# Altium PCB 8x8v2.PcbDoc (part 1 of 3)
Units mil, origin at the board's own origin, x right, y up, seen from the top; angles counter-clockwise.
Board outline 3661.42 x 3661.42 mil, 4 copper layers (Top Layer, VCC Plane, GND Plane, Bottom Layer), stack 30.635 mil thick; 389 components, 265 nets, 1171 pads, 321 vias.
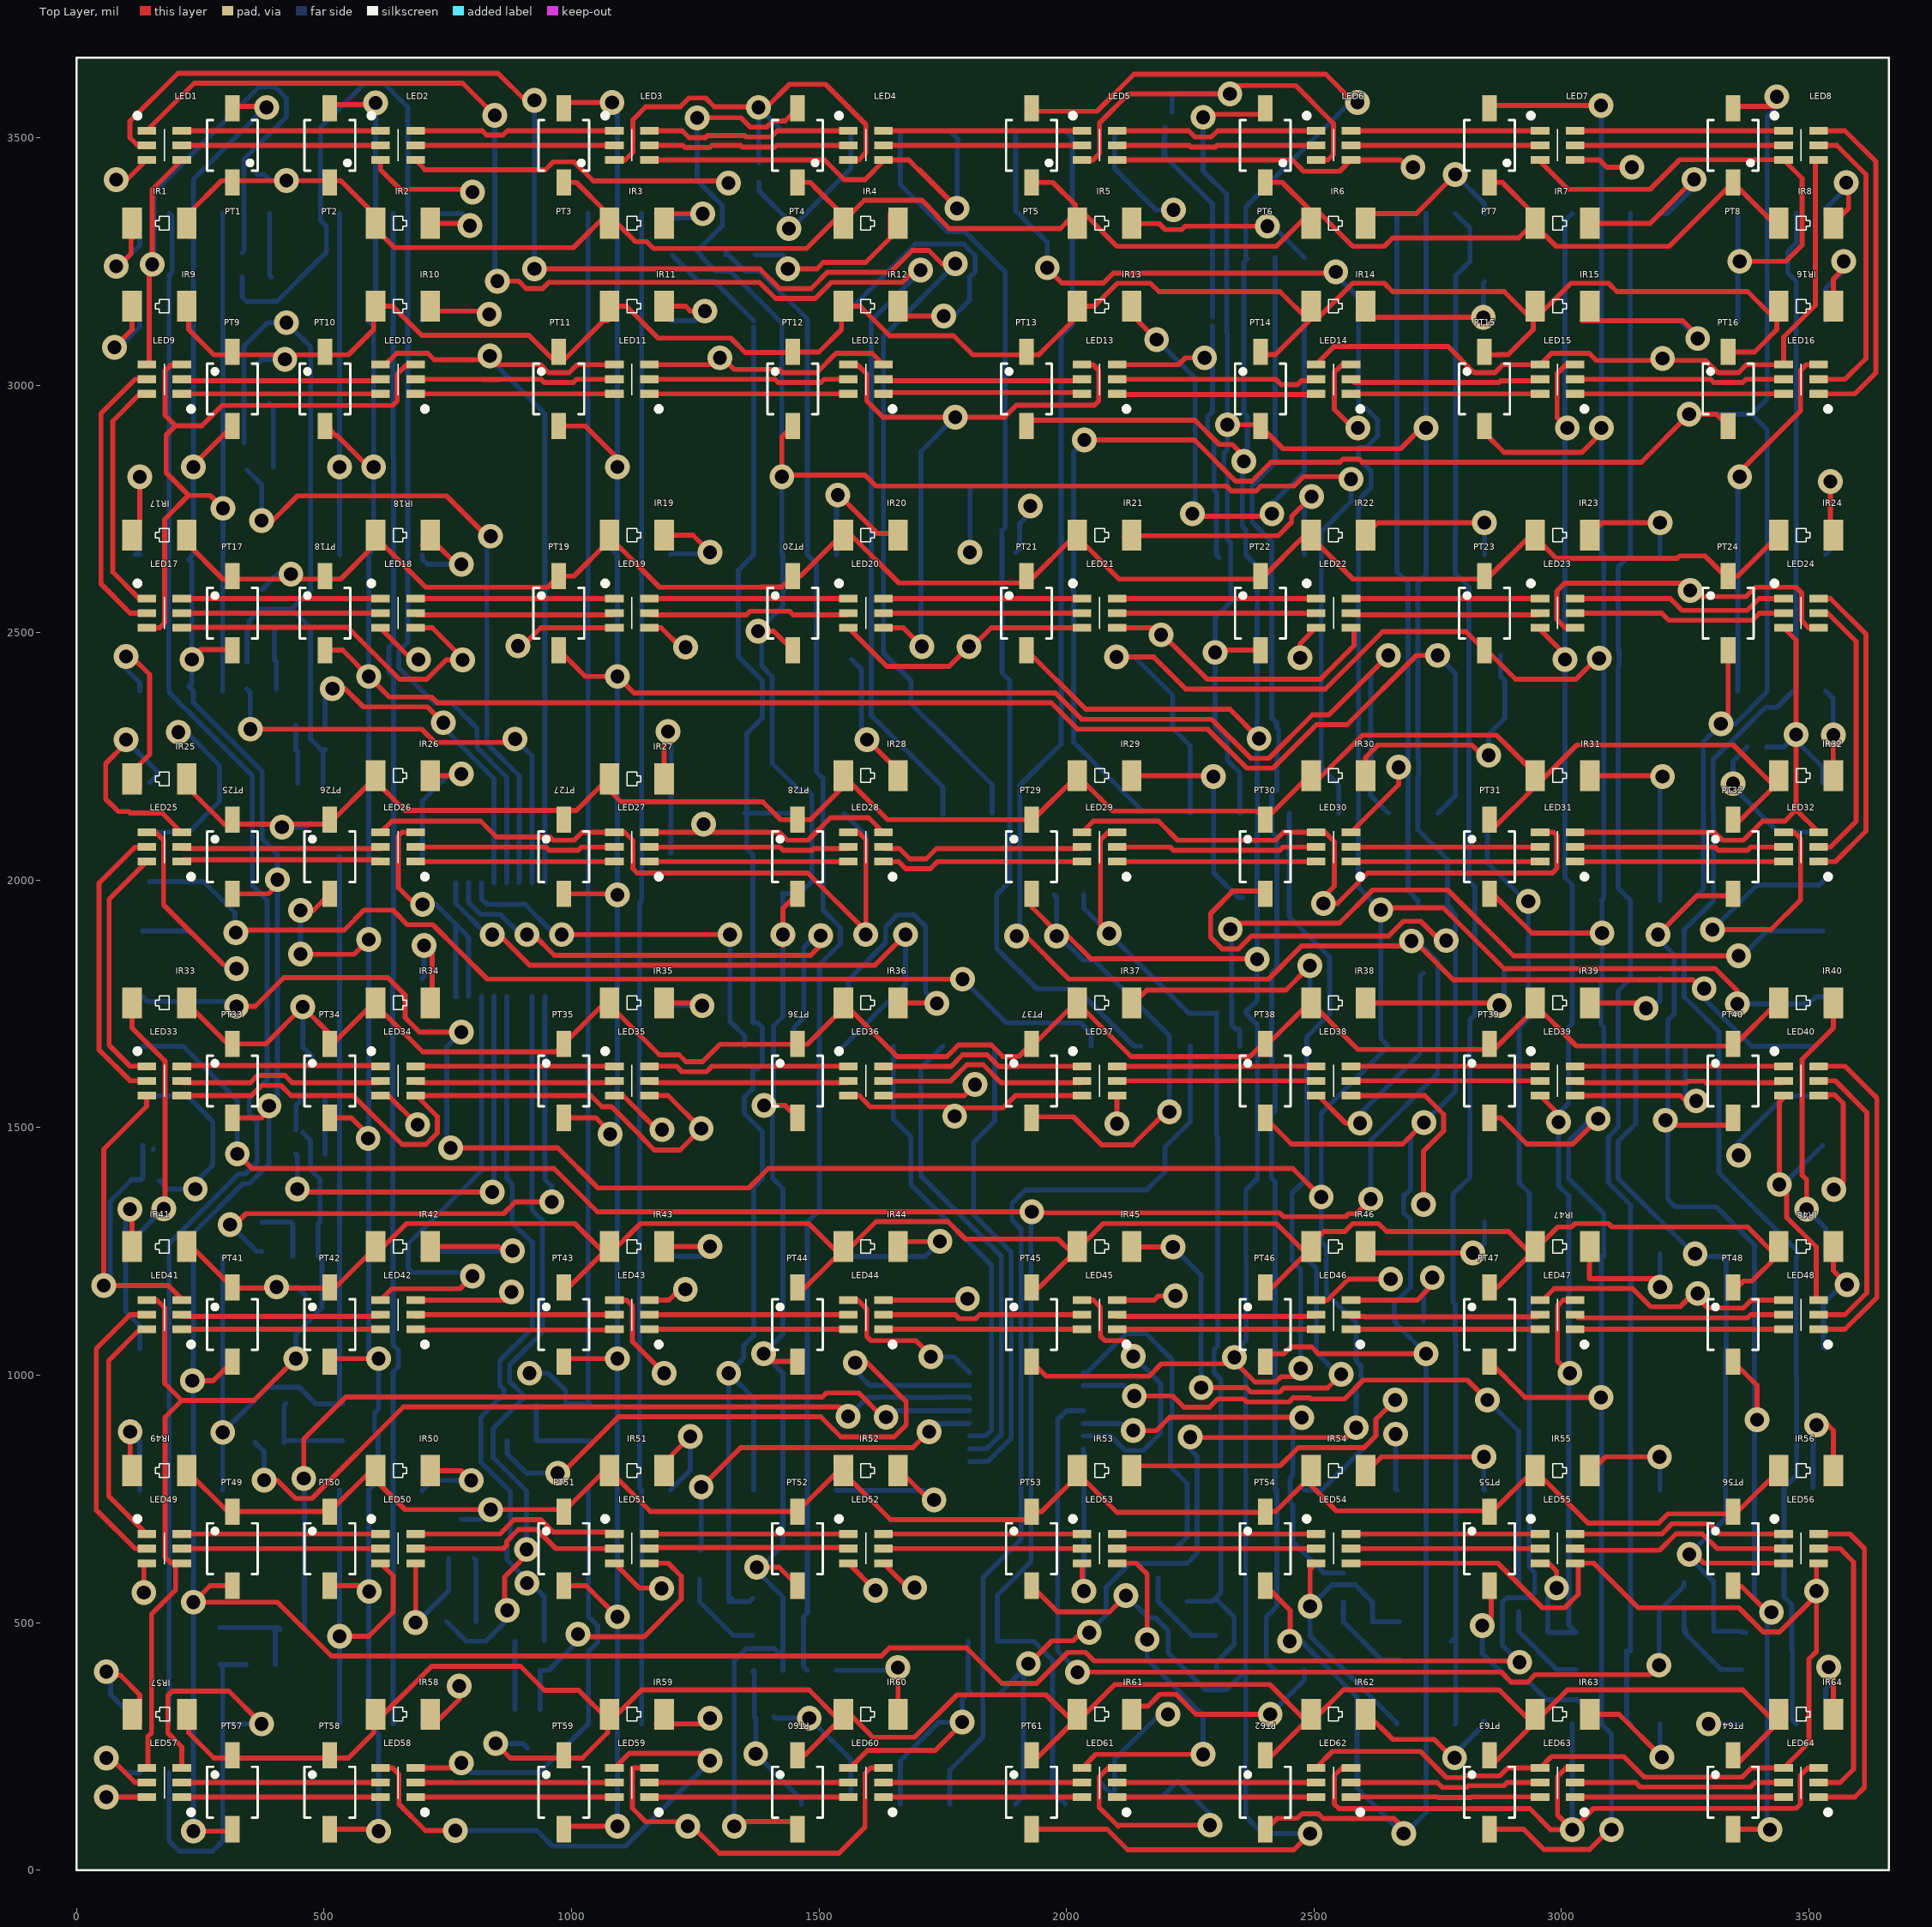
[diagram p0: Top Layer view]
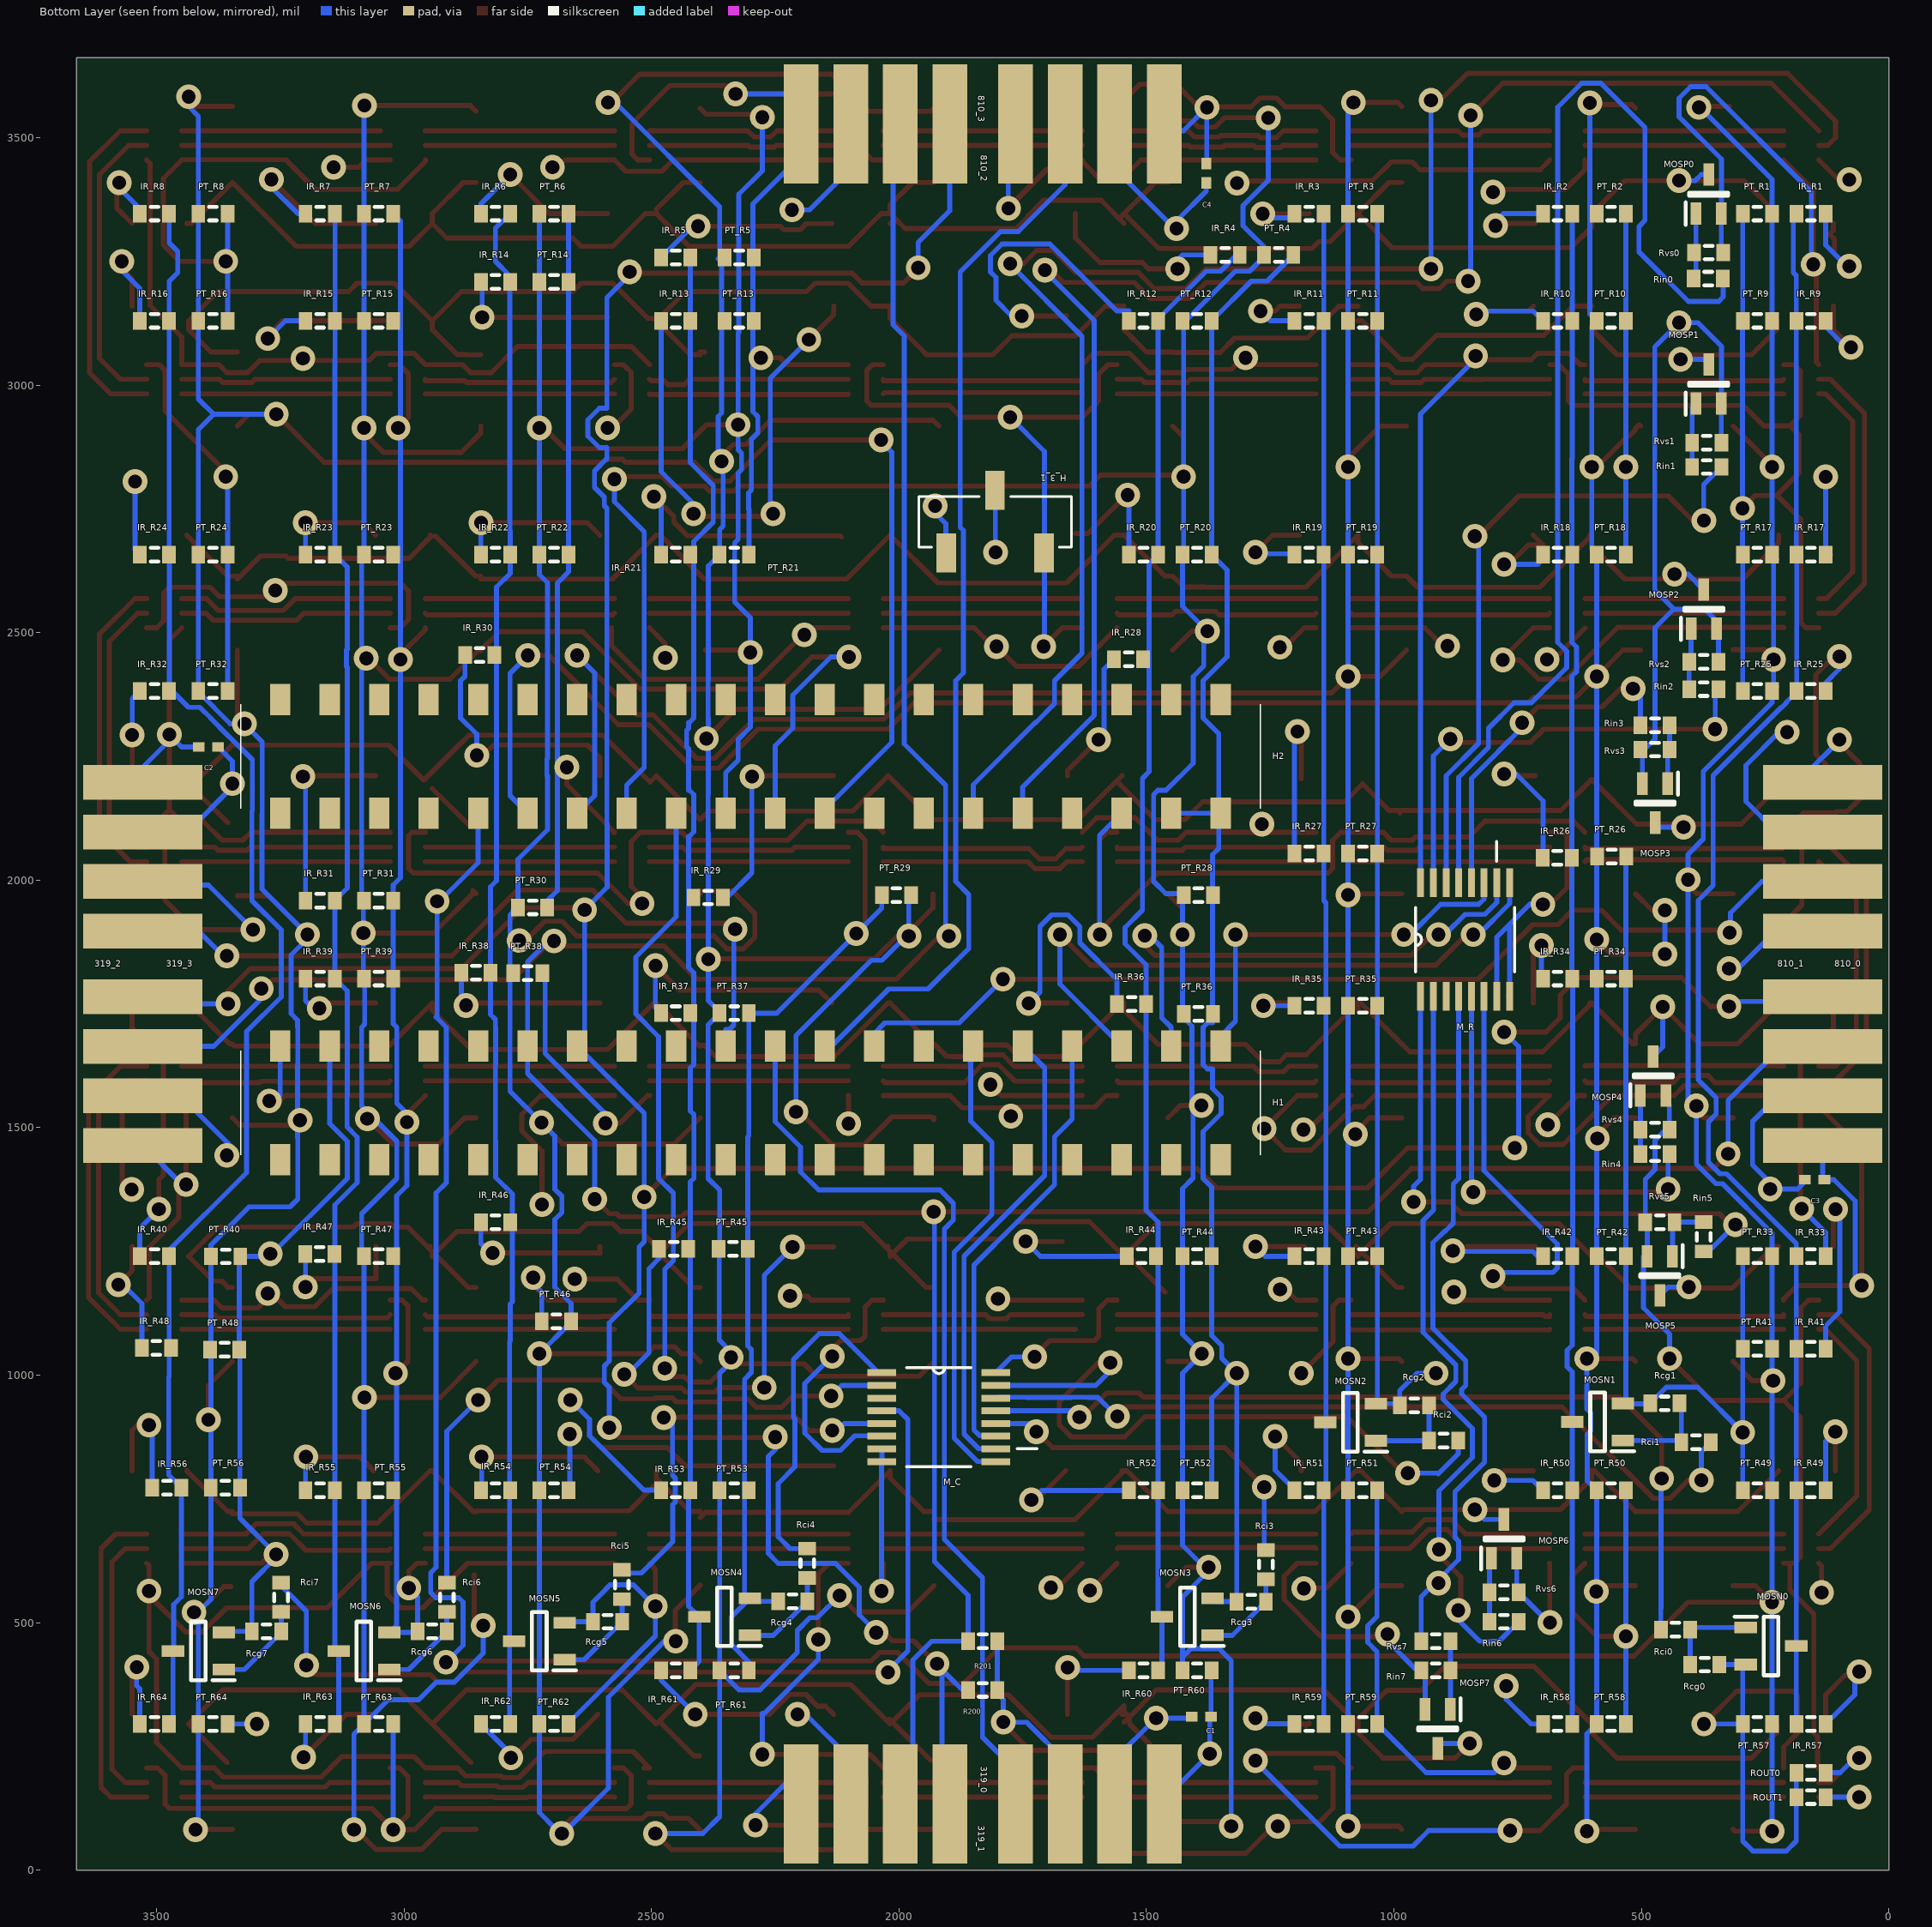
[diagram p1: Bottom Layer view, seen from below]
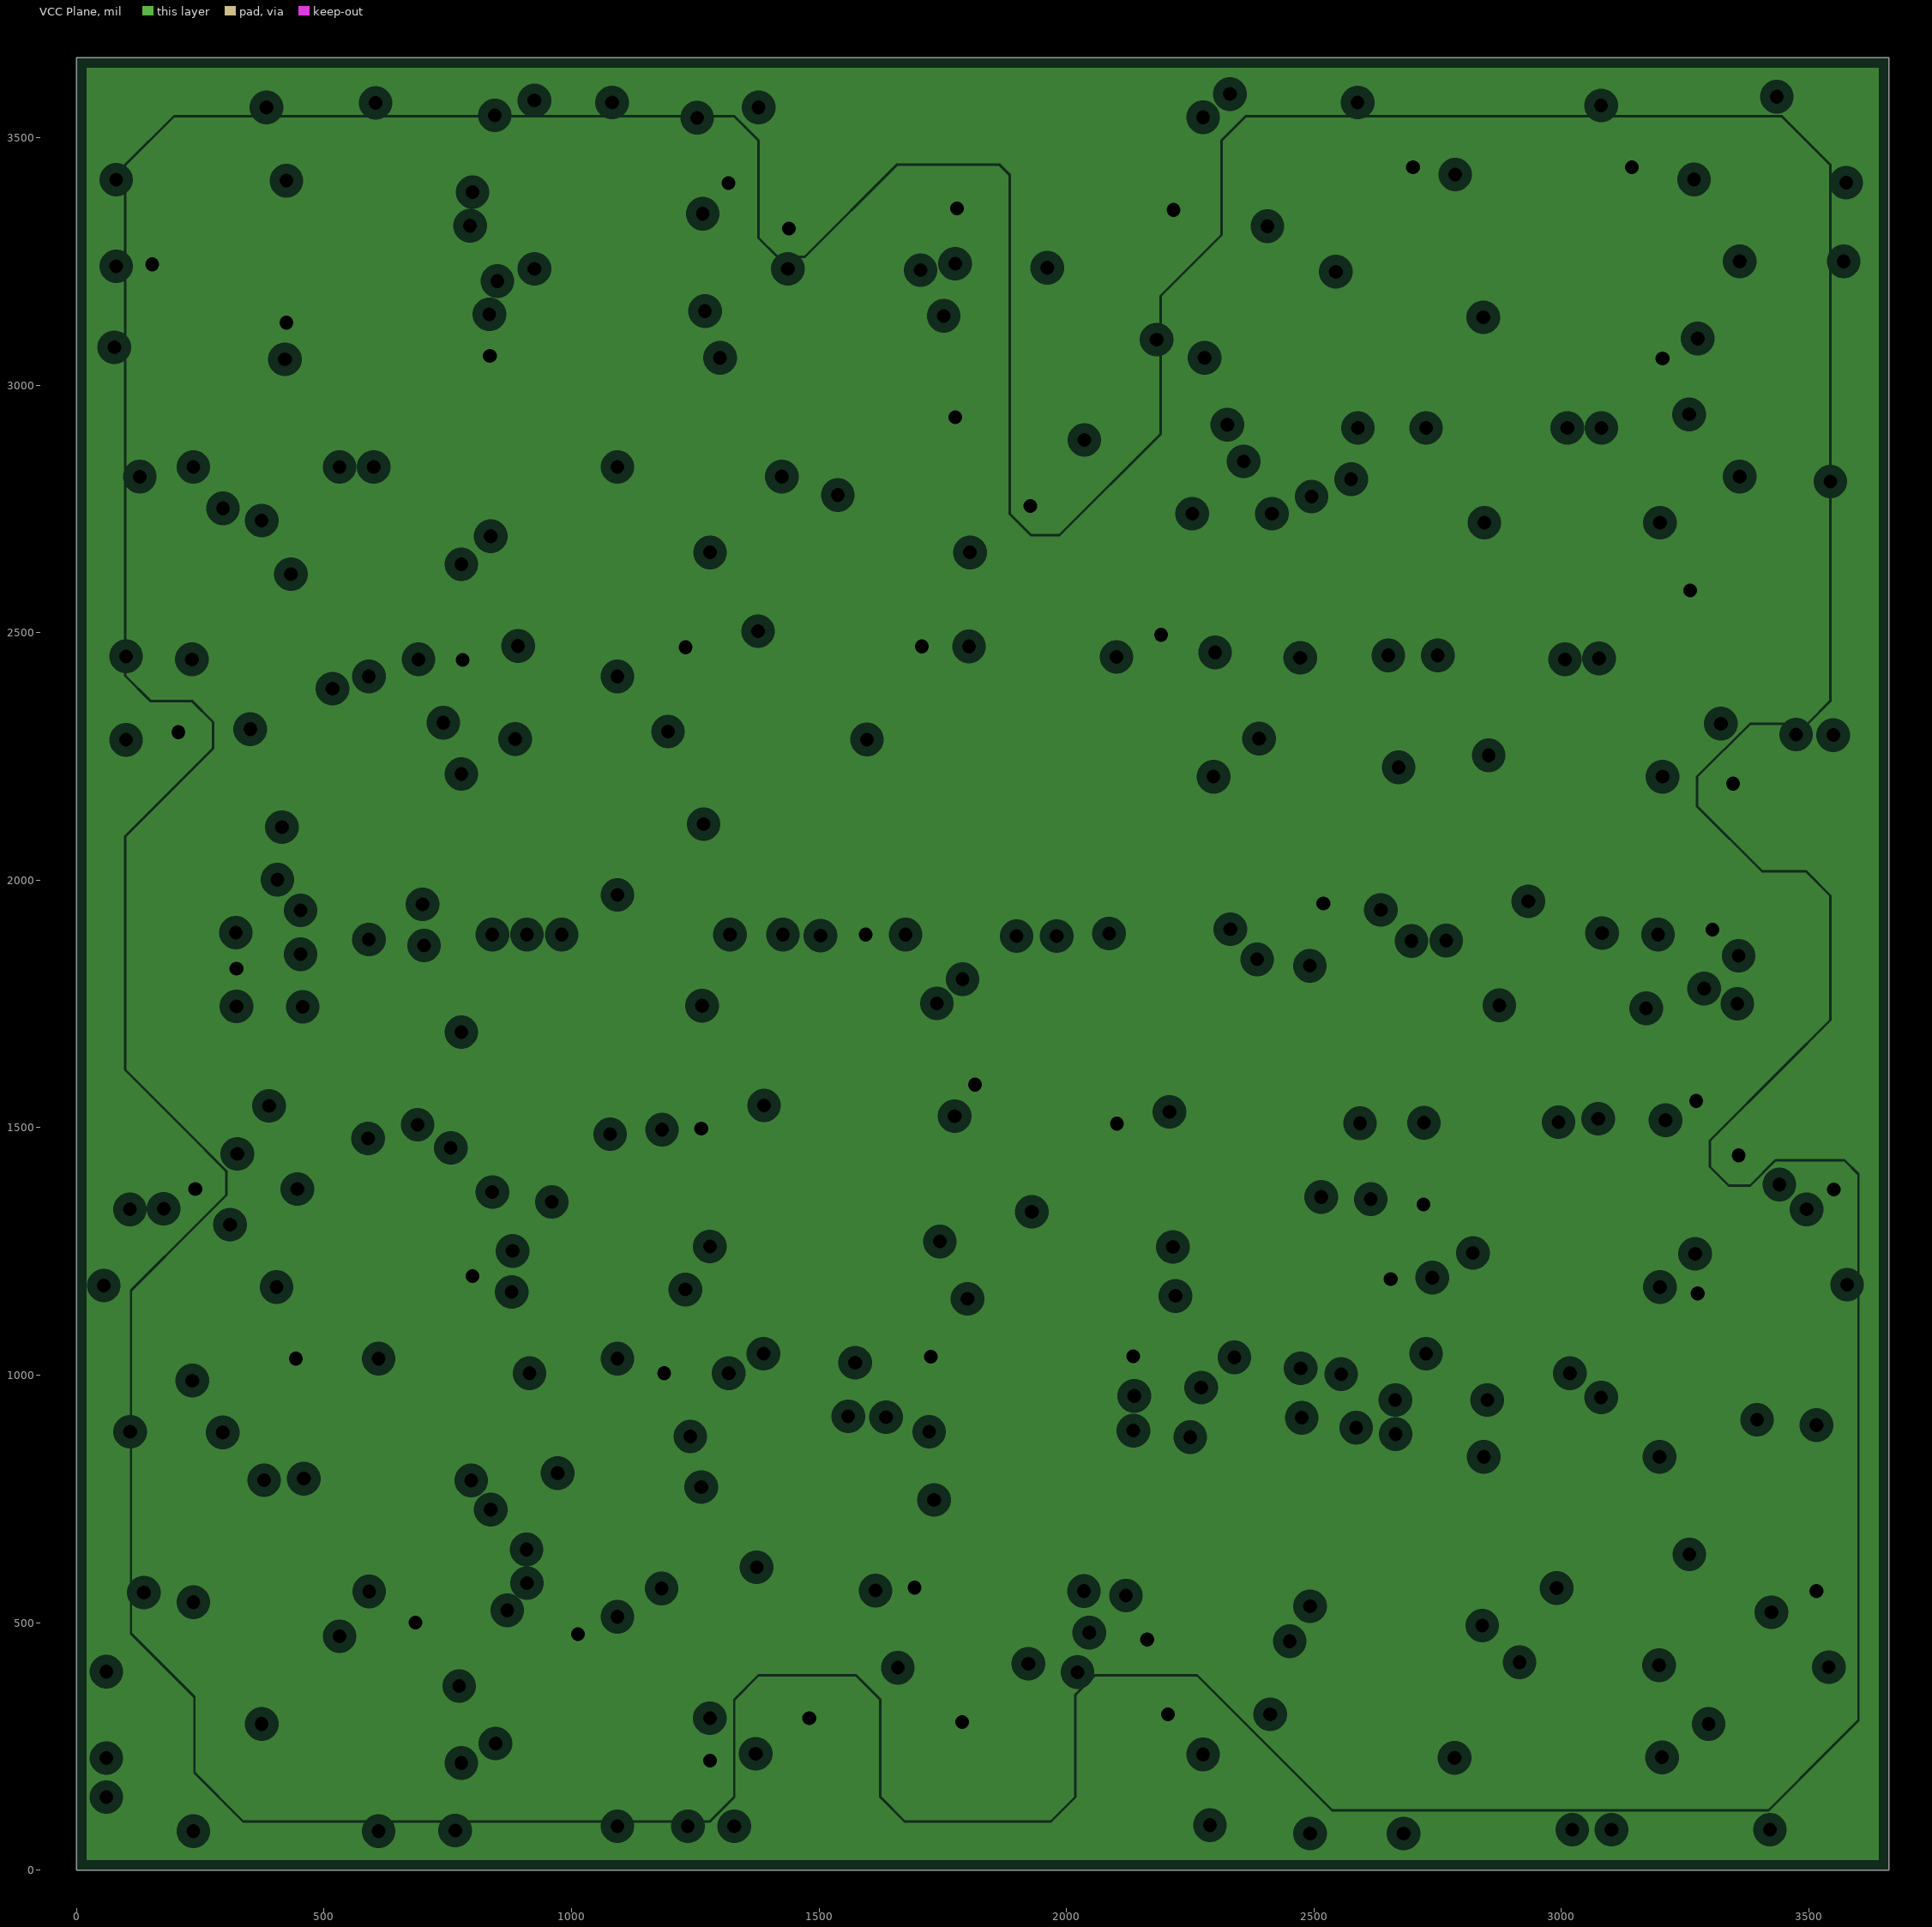
[diagram p2: VCC Plane, clearances drawn from the general rule]
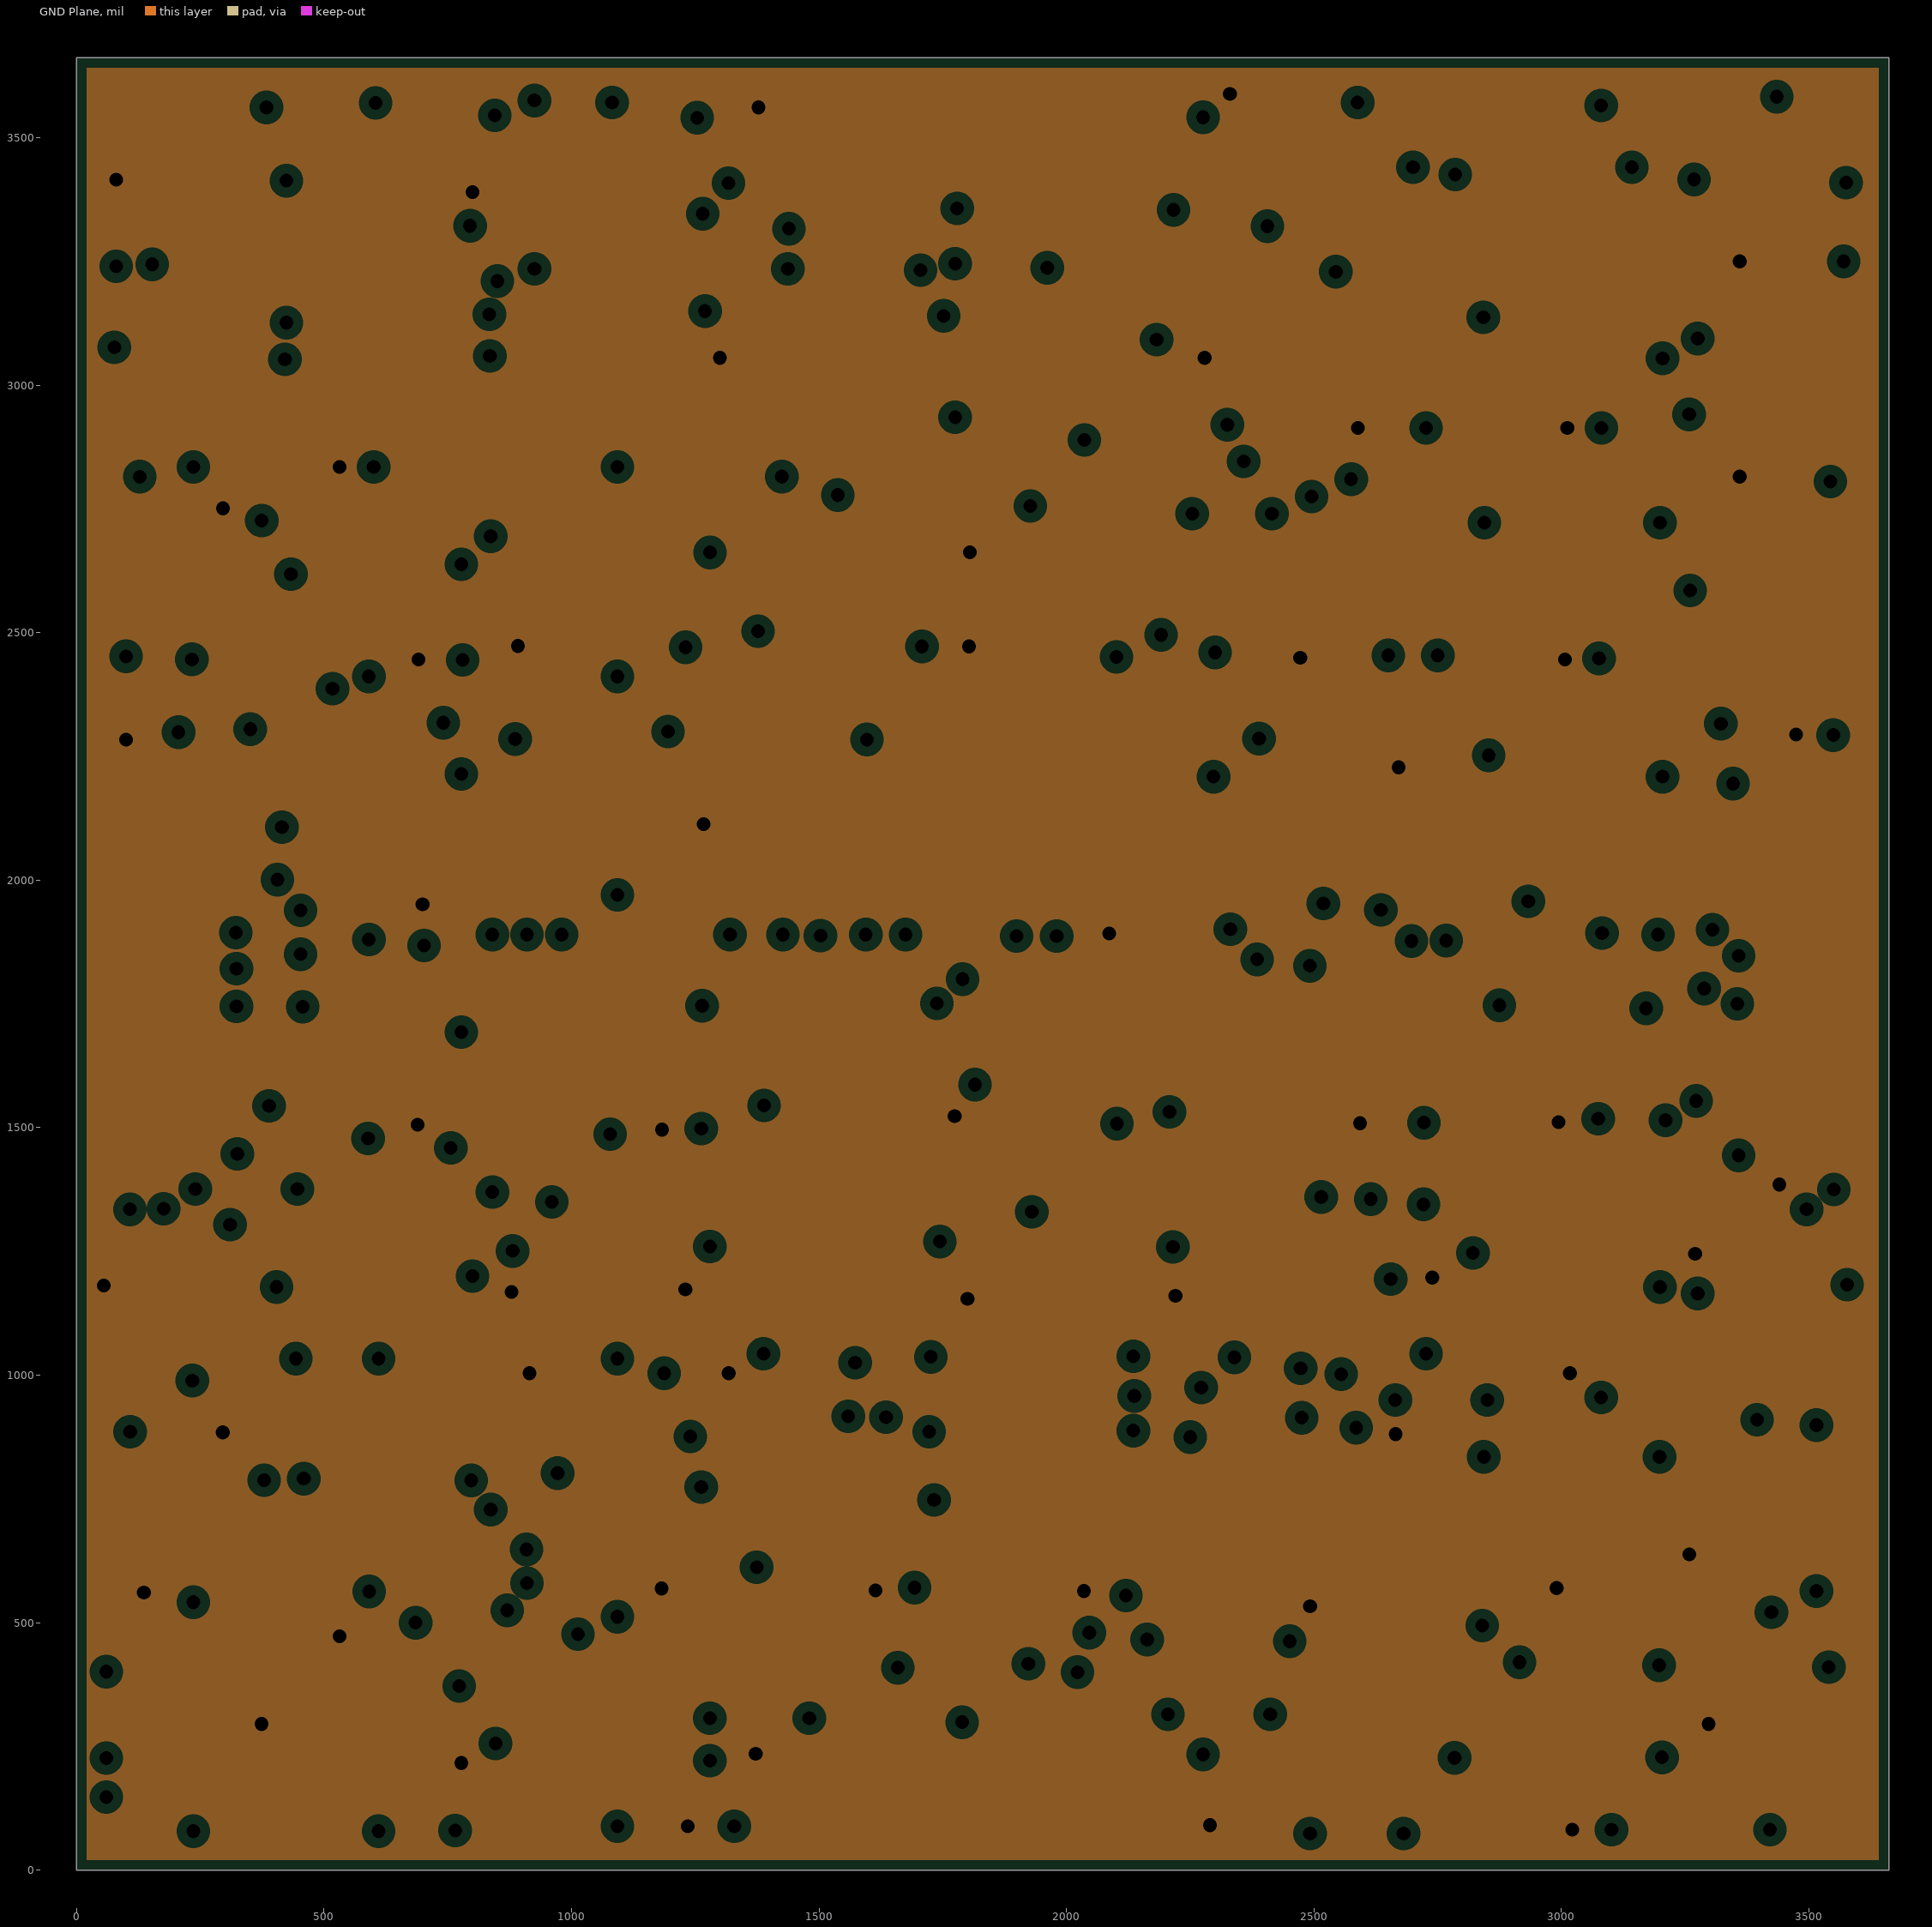
[diagram p3: GND Plane, clearances drawn from the general rule]

## Layer stack, top to bottom
Top Solder: solder mask 0.4, Solder Resist, Dk 3.5
Top Layer: signal copper 1.4
Dielectric 1: core 10, FR-4, Dk 4.2
VCC Plane: plane copper 1.4173, net (Multiple Nets)
Dielectric 4: prepreg 5, Dk 4.2
GND Plane: plane copper 1.4173, net GND
Dielectric 3: core 10, Dk 4.2
Bottom Layer: signal copper 1.4
Bottom Solder: solder mask 0.4, Solder Resist, Dk 3.5

## Board outline
0,0 3661.42,0 3661.42,3661.42 0,3661.42

## Design rules (kind name [scope] priority, off if disabled: settings)
Clearance [All] p1: gap=10
PlaneClearance [All] p1: clearance=20
PlaneConnect [All] p1: planeconnectstyle=Relief reliefexpansion=20 reliefentries=4 reliefconductorwidth=10 reliefairgap=10
PolygonConnect [All] p1: connectstyle=Relief reliefconductorwidth=10 reliefentries=4 polygonreliefangle="90 Angle" airgapwidth=10
RoutingVias [All] p1: holewidth=28 width=50 viastyle="Through Hole" minholewidth=28 minwidth=50 maxholewidth=28 maxwidth=50
SolderMaskExpansion [All] p1: expansion=4
Width [All] p1: maxlimit=10 minlimit=10 preferedwidth=10
28 further rules are at their usual default settings.

## Components (designator, comment, footprint, x,y, rotation, side; value= is the part's Value field where it differs from the comment)
319_0 "319_4" 319_4 1614.17,133.86 r180 bottom
319_1 "319_4" 319_4 2047.24,133.86 r180 bottom
319_2 "319_4" 319_4 3527.56,2047.24 r90 bottom
319_3 "319_4" 319_4 3527.56,1614.17 r90 bottom
810_0 "810_4" 810_4 133.86,2047.24 r90 bottom
810_1 "810_4" 810_4 133.86,1614.17 r90 bottom
810_2 "810_4" 810_4 1614.17,3527.56 r180 bottom
810_3 "810_4" 810_4 2047.24,3527.56 r180 bottom
C1 "Cap Semi" 0402 1389,310 r0 bottom
C2 "Cap Semi" 0402 3395,2269 r180 bottom
C3 "Cap Semi" 0402 150,1395 r0 bottom
C4 "Cap Semi" 0402 1379,3428 r270 bottom
H1 "NPTC202KFMS-RC" NPTC202KFMS-RC 2300,1550 r180 bottom
H2 "NPTC202KFMS-RC" NPTC202KFMS-RC 2300,2250 r180 bottom
H_3_1 "3POSHEADER" 3POSHEADER 1806,2724 r0 bottom
IR1 "IR26-51C" "SFH 4056" 167.32,3326.77 r0 top
IR2 "IR26-51C" "SFH 4056" 659.45,3326.77 r180 top
IR3 "IR26-51C" "SFH 4056" 1131.89,3326.77 r180 top
IR4 "IR26-51C" "SFH 4056" 1604.33,3326.77 r180 top
IR5 "IR26-51C" "SFH 4056" 2076.77,3326.77 r180 top
IR6 "IR26-51C" "SFH 4056" 2549.21,3326.77 r180 top
IR7 "IR26-51C" "SFH 4056" 3001.97,3326.77 r180 top
IR8 "IR26-51C" "SFH 4056" 3494.09,3326.77 r180 top
IR9 "IR26-51C" "SFH 4056" 167.32,3159.45 r0 top
IR10 "IR26-51C" "SFH 4056" 659.45,3159.45 r180 top
IR11 "IR26-51C" "SFH 4056" 1131.89,3159.45 r180 top
IR12 "IR26-51C" "SFH 4056" 1604.33,3159.45 r180 top
IR13 "IR26-51C" "SFH 4056" 2076.77,3159.45 r180 top
IR14 "IR26-51C" "SFH 4056" 2549.21,3159.45 r180 top
IR15 "IR26-51C" "SFH 4056" 3001.97,3159.45 r180 top
IR16 "IR26-51C" "SFH 4056" 3494.09,3159.45 r180 top
IR17 "IR26-51C" "SFH 4056" 167.32,2696.85 r0 top
IR18 "IR26-51C" "SFH 4056" 659.45,2696.85 r180 top
IR19 "IR26-51C" "SFH 4056" 1131.89,2696.85 r180 top
IR20 "IR26-51C" "SFH 4056" 1604.33,2696.85 r180 top
IR21 "IR26-51C" "SFH 4056" 2076.77,2696.85 r180 top
IR22 "IR26-51C" "SFH 4056" 2549.21,2696.85 r180 top
IR23 "IR26-51C" "SFH 4056" 3001.97,2696.85 r180 top
IR24 "IR26-51C" "SFH 4056" 3494.09,2696.85 r180 top
IR25 "IR26-51C" "SFH 4056" 167.32,2204.72 r0 top
IR26 "IR26-51C" "SFH 4056" 659.45,2211.06 r180 top
IR27 "IR26-51C" "SFH 4056" 1131.89,2204.72 r180 top
IR28 "IR26-51C" "SFH 4056" 1604.33,2211.06 r180 top
IR29 "IR26-51C" "SFH 4056" 2076.77,2211.06 r180 top
IR30 "IR26-51C" "SFH 4056" 2549.21,2211.06 r180 top
IR31 "IR26-51C" "SFH 4056" 3001.97,2211.06 r180 top
IR32 "IR26-51C" "SFH 4056" 3494.09,2211.06 r180 top
IR33 "IR26-51C" "SFH 4056" 167.32,1751.97 r0 top
IR34 "IR26-51C" "SFH 4056" 659.45,1751.97 r180 top
IR35 "IR26-51C" "SFH 4056" 1131.89,1751.97 r180 top
IR36 "IR26-51C" "SFH 4056" 1604.33,1751.97 r180 top
IR37 "IR26-51C" "SFH 4056" 2076.77,1751.97 r180 top
IR38 "IR26-51C" "SFH 4056" 2549.21,1751.97 r180 top
IR39 "IR26-51C" "SFH 4056" 3001.97,1751.97 r180 top
IR40 "IR26-51C" "SFH 4056" 3494.09,1751.97 r180 top
IR41 "IR26-51C" "SFH 4056" 167.32,1259.84 r0 top
IR42 "IR26-51C" "SFH 4056" 659.45,1259.84 r180 top
IR43 "IR26-51C" "SFH 4056" 1131.89,1259.84 r180 top
IR44 "IR26-51C" "SFH 4056" 1604.33,1259.84 r180 top
IR45 "IR26-51C" "SFH 4056" 2076.77,1259.84 r180 top
IR46 "IR26-51C" "SFH 4056" 2549.21,1259.84 r180 top
IR47 "IR26-51C" "SFH 4056" 3001.97,1259.84 r180 top
IR48 "IR26-51C" "SFH 4056" 3494.09,1259.84 r180 top
IR49 "IR26-51C" "SFH 4056" 167.32,807.09 r0 top
IR50 "IR26-51C" "SFH 4056" 659.45,807.09 r180 top
IR51 "IR26-51C" "SFH 4056" 1131.89,807.09 r180 top
IR52 "IR26-51C" "SFH 4056" 1604.33,807.09 r180 top
IR53 "IR26-51C" "SFH 4056" 2076.77,807.09 r180 top
IR54 "IR26-51C" "SFH 4056" 2549.21,807.09 r180 top
IR55 "IR26-51C" "SFH 4056" 3001.97,807.09 r180 top
IR56 "IR26-51C" "SFH 4056" 3494.09,807.09 r180 top
IR57 "IR26-51C" "SFH 4056" 167.95,314.96 r0 top
IR58 "IR26-51C" "SFH 4056" 659.45,314.96 r180 top
IR59 "IR26-51C" "SFH 4056" 1131.89,314.96 r180 top
IR60 "IR26-51C" "SFH 4056" 1604.33,314.96 r180 top
IR61 "IR26-51C" "SFH 4056" 2076.77,314.96 r180 top
IR62 "IR26-51C" "SFH 4056" 2549.21,314.96 r180 top
IR63 "IR26-51C" "SFH 4056" 3001.97,314.96 r180 top
IR64 "IR26-51C" "SFH 4056" 3494.09,314.96 r180 top
IR_R1 "Res3" J1-0603 157.48,3346.46 r180 bottom
IR_R2 "Res3" J1-0603 669.29,3346.46 r0 bottom
IR_R3 "Res3" J1-0603 1171.26,3346.46 r0 bottom
IR_R4 "Res3" J1-0603 1340.91,3262.87 r0 bottom
IR_R5 "Res3" J1-0603 2450.79,3257.87 r0 bottom
IR_R6 "Res3" J1-0603 2814.96,3346.46 r0 bottom
IR_R7 "Res3" J1-0603 3169.29,3346.46 r0 bottom
IR_R8 "Res3" J1-0603 3503.94,3346.46 r0 bottom
IR_R9 "Res3" J1-0603 157.48,3129.92 r180 bottom
IR_R10 "Res3" J1-0603 669.29,3129.92 r0 bottom
IR_R11 "Res3" J1-0603 1171.26,3129.92 r0 bottom
IR_R12 "Res3" J1-0603 1505.91,3129.92 r0 bottom
IR_R13 "Res3" J1-0603 2450.79,3129.92 r0 bottom
IR_R14 "Res3" J1-0603 2814.96,3208.66 r0 bottom
IR_R15 "Res3" J1-0603 3169.29,3129.92 r0 bottom
IR_R16 "Res3" J1-0603 3503.94,3129.92 r0 bottom
IR_R17 "Res3" J1-0603 157.48,2657.48 r180 bottom
IR_R18 "Res3" J1-0603 669.29,2657.48 r0 bottom
IR_R19 "Res3" J1-0603 1171.26,2657.48 r0 bottom
IR_R20 "Res3" J1-0603 1505.91,2657.48 r0 bottom
IR_R21 "Res3" J1-0603 2450.79,2657.48 r0 bottom
IR_R22 "Res3" J1-0603 2814.96,2657.48 r0 bottom
IR_R23 "Res3" J1-0603 3169.29,2657.48 r0 bottom
IR_R24 "Res3" J1-0603 3503.94,2657.48 r0 bottom
IR_R25 "Res3" J1-0603 157.48,2381.89 r180 bottom
IR_R26 "Res3" J1-0603 670,2045 r0 bottom
IR_R27 "Res3" J1-0603 1171.26,2053.66 r0 bottom
IR_R28 "Res3" J1-0603 1536,2446 r0 bottom
IR_R29 "Res3" J1-0603 2385.5,1965 r180 bottom
IR_R30 "Res3" J1-0603 2847,2455 r0 bottom
IR_R31 "Res3" J1-0603 3169.29,1958.66 r0 bottom
IR_R32 "Res3" J1-0603 3503.94,2381.89 r0 bottom
IR_R33 "Res3" J1-0603 157.48,1240.16 r180 bottom
IR_R34 "Res3" J1-0603 669.29,1801.18 r0 bottom
IR_R35 "Res3" J1-0603 1171.26,1746.18 r0 bottom
IR_R36 "Res3" J1-0603 1530,1750 r0 bottom
IR_R37 "Res3" J1-0603 2450.79,1731.18 r0 bottom
IR_R38 "Res3" J1-0603 2854.49,1813.18 r0 bottom
IR_R39 "Res3" J1-0603 3169.29,1801.18 r0 bottom
IR_R40 "Res3" J1-0603 3503.94,1240.16 r0 bottom
IR_R41 "Res3" J1-0603 157.48,1053.15 r180 bottom
IR_R42 "Res3" J1-0603 669.29,1240.16 r0 bottom
IR_R43 "Res3" J1-0603 1171.26,1240.16 r0 bottom
IR_R44 "Res3" J1-0603 1510,1240.16 r0 bottom
IR_R45 "Res3" J1-0603 2455,1255 r0 bottom
IR_R46 "Res3" J1-0603 2814.96,1309.06 r0 bottom
IR_R47 "Res3" J1-0603 3170,1245 r0 bottom
IR_R48 "Res3" J1-0603 3500,1055 r0 bottom
IR_R49 "Res3" J1-0603 157.48,767.72 r180 bottom
IR_R50 "Res3" J1-0603 669.29,767.72 r0 bottom
IR_R51 "Res3" J1-0603 1171.26,767.72 r0 bottom
IR_R52 "Res3" J1-0603 1505.91,767.72 r0 bottom
IR_R53 "Res3" J1-0603 2450.79,767.72 r0 bottom
IR_R54 "Res3" J1-0603 2814.96,767.72 r0 bottom
IR_R55 "Res3" J1-0603 3169.29,767.72 r0 bottom
IR_R56 "Res3" J1-0603 3478.94,772.72 r0 bottom
IR_R57 "Res3" J1-0603 157.48,295.28 r180 bottom
IR_R58 "Res3" J1-0603 669.29,295.28 r0 bottom
IR_R59 "Res3" J1-0603 1171.26,295.28 r0 bottom
IR_R60 "Res3" J1-0603 1505.91,403.54 r0 bottom
IR_R61 "Res3" J1-0603 2450.79,403.54 r0 bottom
IR_R62 "Res3" J1-0603 2814.96,295.28 r0 bottom
IR_R63 "Res3" J1-0603 3169.29,295.28 r0 bottom
IR_R64 "Res3" J1-0603 3503.94,295.28 r0 bottom
LED1 "APA102-2020" SON75P200X200X100-6N 177.17,3484.25 r0 top
LED2 "APA102-2020" SON75P200X200X100-6N 649.61,3484.25 r0 top
LED3 "APA102-2020" SON75P200X200X100-6N 1122.05,3484.25 r0 top
LED4 "APA102-2020" SON75P200X200X100-6N 1594.49,3484.25 r0 top
LED5 "APA102-2020" SON75P200X200X100-6N 2066.93,3484.25 r0 top
LED6 "APA102-2020" SON75P200X200X100-6N 2539.37,3484.25 r0 top
LED7 "APA102-2020" SON75P200X200X100-6N 2992.13,3484.25 r0 top
LED8 "APA102-2020" SON75P200X200X100-6N 3484.25,3484.25 r0 top
LED9 "APA102-2020" SON75P200X200X100-6N 177.17,3011.81 r180 top
LED10 "APA102-2020" SON75P200X200X100-6N 649.61,3011.81 r180 top
LED11 "APA102-2020" SON75P200X200X100-6N 1122.05,3011.81 r180 top
LED12 "APA102-2020" SON75P200X200X100-6N 1594.49,3011.81 r180 top
LED13 "APA102-2020" SON75P200X200X100-6N 2066.93,3011.81 r180 top
LED14 "APA102-2020" SON75P200X200X100-6N 2539.37,3011.81 r180 top
LED15 "APA102-2020" SON75P200X200X100-6N 2992.13,3011.81 r180 top
LED16 "APA102-2020" SON75P200X200X100-6N 3484.25,3011.81 r180 top
LED17 "APA102-2020" SON75P200X200X100-6N 177.17,2539.37 r0 top
LED18 "APA102-2020" SON75P200X200X100-6N 649.61,2539.37 r0 top
LED19 "APA102-2020" SON75P200X200X100-6N 1122.05,2539.37 r0 top
LED20 "APA102-2020" SON75P200X200X100-6N 1594.49,2539.37 r0 top
LED21 "APA102-2020" SON75P200X200X100-6N 2066.93,2539.37 r0 top
LED22 "APA102-2020" SON75P200X200X100-6N 2539.37,2539.37 r0 top
LED23 "APA102-2020" SON75P200X200X100-6N 2992.13,2539.37 r0 top
LED24 "APA102-2020" SON75P200X200X100-6N 3484.25,2539.37 r0 top
LED25 "APA102-2020" SON75P200X200X100-6N 177.17,2066.93 r180 top
LED26 "APA102-2020" SON75P200X200X100-6N 649.61,2066.93 r180 top
LED27 "APA102-2020" SON75P200X200X100-6N 1122.05,2066.93 r180 top
LED28 "APA102-2020" SON75P200X200X100-6N 1594.49,2066.93 r180 top
LED29 "APA102-2020" SON75P200X200X100-6N 2066.93,2066.93 r180 top
LED30 "APA102-2020" SON75P200X200X100-6N 2539.37,2066.93 r180 top
LED31 "APA102-2020" SON75P200X200X100-6N 2992.13,2066.93 r180 top
LED32 "APA102-2020" SON75P200X200X100-6N 3484.25,2066.93 r180 top
LED33 "APA102-2020" SON75P200X200X100-6N 177.17,1594.49 r0 top
LED34 "APA102-2020" SON75P200X200X100-6N 649.61,1594.49 r0 top
LED35 "APA102-2020" SON75P200X200X100-6N 1122.05,1594.49 r0 top
LED36 "APA102-2020" SON75P200X200X100-6N 1594.49,1594.49 r0 top
LED37 "APA102-2020" SON75P200X200X100-6N 2066.93,1594.49 r0 top
LED38 "APA102-2020" SON75P200X200X100-6N 2539.37,1594.49 r0 top
LED39 "APA102-2020" SON75P200X200X100-6N 2992.13,1594.49 r0 top
LED40 "APA102-2020" SON75P200X200X100-6N 3484.25,1594.49 r0 top
LED41 "APA102-2020" SON75P200X200X100-6N 177.17,1122.05 r180 top
LED42 "APA102-2020" SON75P200X200X100-6N 649.61,1122.05 r180 top
LED43 "APA102-2020" SON75P200X200X100-6N 1122.05,1122.05 r180 top
LED44 "APA102-2020" SON75P200X200X100-6N 1594.49,1122.05 r180 top
LED45 "APA102-2020" SON75P200X200X100-6N 2066.93,1122.05 r180 top
LED46 "APA102-2020" SON75P200X200X100-6N 2539.37,1122.05 r180 top
LED47 "APA102-2020" SON75P200X200X100-6N 2992.13,1122.05 r180 top
LED48 "APA102-2020" SON75P200X200X100-6N 3484.25,1122.05 r180 top
LED49 "APA102-2020" SON75P200X200X100-6N 177.17,649.61 r0 top
LED50 "APA102-2020" SON75P200X200X100-6N 649.61,649.61 r0 top
LED51 "APA102-2020" SON75P200X200X100-6N 1122.05,649.61 r0 top
LED52 "APA102-2020" SON75P200X200X100-6N 1594.49,649.61 r0 top
LED53 "APA102-2020" SON75P200X200X100-6N 2066.93,649.61 r0 top
LED54 "APA102-2020" SON75P200X200X100-6N 2539.37,649.61 r0 top
LED55 "APA102-2020" SON75P200X200X100-6N 2992.13,649.61 r0 top
LED56 "APA102-2020" SON75P200X200X100-6N 3484.25,649.61 r0 top
LED57 "APA102-2020" SON75P200X200X100-6N 177.17,177.17 r180 top
LED58 "APA102-2020" SON75P200X200X100-6N 649.61,177.17 r180 top
LED59 "APA102-2020" SON75P200X200X100-6N 1122.05,177.17 r180 top
LED60 "APA102-2020" SON75P200X200X100-6N 1594.49,177.17 r180 top
LED61 "APA102-2020" SON75P200X200X100-6N 2066.93,177.17 r180 top
LED62 "APA102-2020" SON75P200X200X100-6N 2539.37,177.17 r180 top
LED63 "APA102-2020" SON75P200X200X100-6N 2992.13,177.17 r180 top
LED64 "APA102-2020" SON75P200X200X100-6N 3484.25,177.17 r180 top
M_C "8-channel analog multiplexer/demultiplexer   Source:  Datasheet" SOP65P640X110-16N 1919.29,915.35 r180 bottom
M_R "8-channel analog multiplexer/demultiplexer   Source:  Datasheet" SOP65P640X110-16N 856.3,1879.92 r90 bottom
MOSN0 "MOSFET 12V N-Ch Enh FET 2426pF 27.3nC   Source:  Datasheet" SOT95P285X130-3N 238.19,452.76 r180 bottom
MOSN1 "MOSFET 12V N-Ch Enh FET 2426pF 27.3nC   Source:  Datasheet" SOT95P285X130-3N 588.58,905.51 r0 bottom
MOSN2 "MOSFET 12V N-Ch Enh FET 2426pF 27.3nC   Source:  Datasheet" SOT95P285X130-3N 1087.6,904.86 r0 bottom
MOSN3 "MOSFET 12V N-Ch Enh FET 2426pF 27.3nC   Source:  Datasheet" SOT95P285X130-3N 1417.32,511.81 r0 bottom
MOSN4 "MOSFET 12V N-Ch Enh FET 2426pF 27.3nC   Source:  Datasheet" SOT95P285X130-3N 2352.36,511.81 r0 bottom
MOSN5 "MOSFET 12V N-Ch Enh FET 2426pF 27.3nC   Source:  Datasheet" SOT95P285X130-3N 2726.38,462.6 r0 bottom
MOSN6 "MOSFET 12V N-Ch Enh FET 2426pF 27.3nC   Source:  Datasheet" SOT95P285X130-3N 3080.71,442.91 r0 bottom
MOSN7 "MOSFET 12V N-Ch Enh FET 2426pF 27.3nC   Source:  Datasheet" SOT95P285X130-3N 3415.35,442.91 r0 bottom
MOSP0 "Power MOSFET   Source:  Datasheet" SOT65P220X100-3N 364.17,3385.83 r90 bottom
MOSP1 "Power MOSFET   Source:  Datasheet" SOT65P220X100-3N 364.17,3001.97 r90 bottom
MOSP2 "Power MOSFET   Source:  Datasheet" SOT65P220X100-3N 374.02,2547.24 r90 bottom
MOSP3 "Power MOSFET   Source:  Datasheet" SOT65P220X100-3N 472.44,2155.51 r270 bottom
MOSP4 "Power MOSFET   Source:  Datasheet" SOT65P220X100-3N 476.38,1604.33 r90 bottom
MOSP5 "Power MOSFET   Source:  Datasheet" SOT65P220X100-3N 462.6,1200.79 r270 bottom
MOSP6 "Power MOSFET   Source:  Datasheet" SOT65P220X100-3N 777.56,669.29 r90 bottom
MOSP7 "Power MOSFET   Source:  Datasheet" SOT65P220X100-3N 911.42,285.43 r270 bottom
PT1 "PT26-51B" VEMT2020X01 314.96,3484.25 r90 top
PT2 "PT26-51B" VEMT2020X01 511.81,3484.25 r90 top
PT3 "PT26-51B" VEMT2020X01 984.25,3484.25 r90 top
PT4 "PT26-51B" VEMT2020X01 1456.69,3484.25 r90 top
PT5 "PT26-51B" VEMT2020X01 1929.13,3484.25 r90 top
PT6 "PT26-51B" VEMT2020X01 2401.57,3484.25 r90 top
PT7 "PT26-51B" VEMT2020X01 2854.33,3484.25 r90 top
PT8 "PT26-51B" VEMT2020X01 3346.46,3484.25 r90 top
PT9 "PT26-51B" VEMT2020X01 314.96,2992.13 r270 top
PT10 "PT26-51B" VEMT2020X01 501.97,2992.13 r270 top
PT11 "PT26-51B" VEMT2020X01 974.41,2992.13 r270 top
PT12 "PT26-51B" VEMT2020X01 1446.85,2992.13 r270 top
PT13 "PT26-51B" VEMT2020X01 1919.29,2992.13 r270 top
PT14 "PT26-51B" VEMT2020X01 2391.73,2992.13 r270 top
PT15 "PT26-51B" VEMT2020X01 2844.49,2992.13 r270 top
PT16 "PT26-51B" VEMT2020X01 3336.61,2992.13 r270 top
PT17 "PT26-51B" VEMT2020X01 314.96,2539.37 r270 top
PT18 "PT26-51B" VEMT2020X01 501.97,2539.37 r270 top
PT19 "PT26-51B" VEMT2020X01 974.41,2539.37 r270 top
PT20 "PT26-51B" VEMT2020X01 1446.85,2539.37 r270 top
PT21 "PT26-51B" VEMT2020X01 1919.29,2539.37 r270 top
PT22 "PT26-51B" VEMT2020X01 2391.73,2539.37 r270 top
PT23 "PT26-51B" VEMT2020X01 2844.49,2539.37 r270 top
PT24 "PT26-51B" VEMT2020X01 3336.61,2539.37 r270 top
PT25 "PT26-51B" VEMT2020X01 314.96,2047.24 r270 top
PT26 "PT26-51B" VEMT2020X01 511.81,2047.24 r270 top
PT27 "PT26-51B" VEMT2020X01 984.25,2047.24 r270 top
PT28 "PT26-51B" VEMT2020X01 1456.69,2047.24 r270 top
PT29 "PT26-51B" VEMT2020X01 1929.13,2047.24 r270 top
PT30 "PT26-51B" VEMT2020X01 2401.57,2047.24 r270 top
PT31 "PT26-51B" VEMT2020X01 2854.33,2047.24 r270 top
PT32 "PT26-51B" VEMT2020X01 3346.46,2047.24 r270 top
PT33 "PT26-51B" VEMT2020X01 314.96,1594.49 r270 top
PT34 "PT26-51B" VEMT2020X01 511.81,1594.49 r270 top
PT35 "PT26-51B" VEMT2020X01 984.25,1594.49 r270 top
PT36 "PT26-51B" VEMT2020X01 1456.69,1594.49 r270 top
PT37 "PT26-51B" VEMT2020X01 1929.13,1594.49 r270 top
PT38 "PT26-51B" VEMT2020X01 2401.57,1594.49 r270 top
PT39 "PT26-51B" VEMT2020X01 2854.33,1594.49 r270 top
PT40 "PT26-51B" VEMT2020X01 3346.46,1594.49 r270 top
PT41 "PT26-51B" VEMT2020X01 314.96,1102.36 r270 top
PT42 "PT26-51B" VEMT2020X01 511.81,1102.36 r270 top
PT43 "PT26-51B" VEMT2020X01 984.25,1102.36 r270 top
PT44 "PT26-51B" VEMT2020X01 1456.69,1102.36 r270 top
PT45 "PT26-51B" VEMT2020X01 1929.13,1102.36 r270 top
PT46 "PT26-51B" VEMT2020X01 2401.57,1102.36 r270 top
PT47 "PT26-51B" VEMT2020X01 2854.33,1102.36 r270 top
PT48 "PT26-51B" VEMT2020X01 3346.46,1102.36 r270 top
PT49 "PT26-51B" VEMT2020X01 314.96,649.61 r270 top
PT50 "PT26-51B" VEMT2020X01 511.81,649.61 r270 top
PT51 "PT26-51B" VEMT2020X01 984.25,649.61 r270 top
PT52 "PT26-51B" VEMT2020X01 1456.69,649.61 r270 top
PT53 "PT26-51B" VEMT2020X01 1929.13,649.61 r270 top
PT54 "PT26-51B" VEMT2020X01 2401.57,649.61 r270 top
PT55 "PT26-51B" VEMT2020X01 2854.33,649.61 r270 top
PT56 "PT26-51B" VEMT2020X01 3346.46,649.61 r270 top
PT57 "PT26-51B" VEMT2020X01 314.96,157.48 r270 top
PT58 "PT26-51B" VEMT2020X01 511.81,157.48 r270 top
PT59 "PT26-51B" VEMT2020X01 984.25,157.48 r270 top
PT60 "PT26-51B" VEMT2020X01 1456.69,157.48 r270 top
PT61 "PT26-51B" VEMT2020X01 1929.13,157.48 r270 top
PT62 "PT26-51B" VEMT2020X01 2401.57,157.48 r270 top
PT63 "PT26-51B" VEMT2020X01 2854.33,157.48 r270 top
PT64 "PT26-51B" VEMT2020X01 3346.46,157.48 r270 top
PT_R1 "Res3" J1-0603 265.75,3346.46 r180 bottom
PT_R2 "Res3" J1-0603 561.02,3346.46 r0 bottom
PT_R3 "Res3" J1-0603 1062.99,3346.46 r0 bottom
PT_R4 "Res3" J1-0603 1232.64,3262.87 r0 bottom
PT_R5 "Res3" J1-0603 2322.68,3257.87 r0 bottom
PT_R6 "Res3" J1-0603 2696.85,3346.46 r0 bottom
PT_R7 "Res3" J1-0603 3051.18,3346.46 r0 bottom
PT_R8 "Res3" J1-0603 3385.83,3346.46 r0 bottom
PT_R9 "Res3" J1-0603 265.75,3129.92 r180 bottom
PT_R10 "Res3" J1-0603 561.02,3129.92 r0 bottom
PT_R11 "Res3" J1-0603 1062.99,3129.92 r0 bottom
PT_R12 "Res3" J1-0603 1397.64,3129.92 r0 bottom
PT_R13 "Res3" J1-0603 2322.68,3129.92 r0 bottom
PT_R14 "Res3" J1-0603 2696.85,3208.66 r0 bottom
PT_R15 "Res3" J1-0603 3051.18,3129.92 r0 bottom
PT_R16 "Res3" J1-0603 3385.83,3129.92 r0 bottom
PT_R17 "Res3" J1-0603 265.75,2657.48 r180 bottom
PT_R18 "Res3" J1-0603 561.02,2657.48 r0 bottom
PT_R19 "Res3" J1-0603 1062.99,2657.48 r0 bottom
PT_R20 "Res3" J1-0603 1397.64,2657.48 r0 bottom
PT_R21 "Res3" J1-0603 2332.68,2657.48 r0 bottom
PT_R22 "Res3" J1-0603 2696.85,2657.48 r0 bottom
PT_R23 "Res3" J1-0603 3051.18,2657.48 r0 bottom
PT_R24 "Res3" J1-0603 3385.83,2657.48 r0 bottom
PT_R25 "Res3" J1-0603 265.75,2381.89 r180 bottom
PT_R26 "Res3" J1-0603 560,2048 r0 bottom
PT_R27 "Res3" J1-0603 1062.99,2053.66 r0 bottom
PT_R28 "Res3" J1-0603 1395,1970 r0 bottom
PT_R29 "Res3" J1-0603 2005,1970 r180 bottom
PT_R30 "Res3" J1-0603 2740,1945 r0 bottom
PT_R31 "Res3" J1-0603 3051.18,1958.66 r0 bottom
PT_R32 "Res3" J1-0603 3385.83,2381.89 r0 bottom
PT_R33 "Res3" J1-0603 265.75,1240.16 r180 bottom
PT_R34 "Res3" J1-0603 561.02,1801.18 r0 bottom
PT_R35 "Res3" J1-0603 1062.99,1746.18 r0 bottom
PT_R36 "Res3" J1-0603 1395,1730 r0 bottom
PT_R37 "Res3" J1-0603 2332.68,1731.18 r0 bottom
PT_R38 "Res3" J1-0603 2750,1812 r0 bottom
PT_R39 "Res3" J1-0603 3051.18,1801.18 r0 bottom
PT_R40 "Res3" J1-0603 3360,1240 r0 bottom
PT_R41 "Res3" J1-0603 265.75,1053.15 r180 bottom
PT_R42 "Res3" J1-0603 561.02,1240.16 r0 bottom
PT_R43 "Res3" J1-0603 1062.99,1240.16 r0 bottom
PT_R44 "Res3" J1-0603 1397.64,1240.16 r0 bottom
PT_R45 "Res3" J1-0603 2335,1255 r0 bottom
PT_R46 "Res3" J1-0603 2692,1109 r180 bottom
PT_R47 "Res3" J1-0603 3051.18,1240.16 r0 bottom
PT_R48 "Res3" J1-0603 3362.13,1051.3 r0 bottom
PT_R49 "Res3" J1-0603 265.75,767.72 r180 bottom
PT_R50 "Res3" J1-0603 561.02,767.72 r0 bottom
PT_R51 "Res3" J1-0603 1062.99,767.72 r0 bottom
PT_R52 "Res3" J1-0603 1397.64,767.72 r0 bottom
PT_R53 "Res3" J1-0603 2332.68,767.72 r0 bottom
PT_R54 "Res3" J1-0603 2696.85,767.72 r0 bottom
PT_R55 "Res3" J1-0603 3051.18,767.72 r0 bottom
PT_R56 "Res3" J1-0603 3360.83,772.72 r0 bottom
PT_R57 "Res3" J1-0603 265.75,295.28 r180 bottom
PT_R58 "Res3" J1-0603 561.02,295.28 r0 bottom
PT_R59 "Res3" J1-0603 1062.99,295.28 r0 bottom
PT_R60 "Res3" J1-0603 1397.64,403.54 r0 bottom
PT_R61 "Res3" J1-0603 2332.68,403.54 r0 bottom
PT_R62 "Res3" J1-0603 2696.85,295.28 r0 bottom
PT_R63 "Res3" J1-0603 3051,295.28 r0 bottom
PT_R64 "Res3" J1-0603 3385.83,295.28 r0 bottom
R200 "Res3" J1-0603 1830.71,364.17 r0 bottom
R201 "4.7K" J1-0603 1830.71,462.6 r0 bottom
Rcg0 "Res3" J1-0603 372.05,415.35 r180 bottom
Rcg1 "Res3" J1-0603 452.76,942.91 r0 bottom
Rcg2 "Res3" J1-0603 958.66,938.98 r0 bottom
Rcg3 "Res3" J1-0603 1288.05,542.52 r0 bottom
Rcg4 "Res3" J1-0603 2214.57,543.31 r0 bottom
Rcg5 "Res3" J1-0603 2588.58,501.97 r0 bottom
Rcg6 "Res3" J1-0603 2942.91,482.28 r0 bottom
Rcg7 "Res3" J1-0603 3277.56,482.28 r0 bottom
Rci0 "Res3" J1-0603 431.1,486.22 r180 bottom
Rci1 "Res3" J1-0603 389.76,864.17 r0 bottom
Rci2 "Res3" J1-0603 899.61,868.11 r0 bottom
Rci3 "Res3" J1-0603 1258.52,617.32 r270 bottom
Rci4 "Res3" J1-0603 2185.04,620.08 r270 bottom
Rci5 "Res3" J1-0603 2560,577 r270 bottom
Rci6 "Res3" J1-0603 2913.39,551.18 r270 bottom
Rci7 "Res3" J1-0603 3248.03,551.18 r270 bottom
Rin0 "Res3" J1-0603 365,3215 r180 bottom
Rin1 "Res3" J1-0603 368.11,2834.65 r180 bottom
Rin2 "Res3" J1-0603 374.02,2385.83 r180 bottom
Rin3 "Res3" J1-0603 472.44,2312.99 r0 bottom
Rin4 "Res3" J1-0603 472.44,1446.85 r180 bottom
Rin5 "Res3" J1-0603 374.02,1279.53 r270 bottom
Rin6 "Res3" J1-0603 777.56,501.97 r180 bottom
Rin7 "Res3" J1-0603 915.35,462.6 r0 bottom
ROUT0 "Res3" J1-0603 157.48,196.85 r180 bottom
ROUT1 "Res3" J1-0603 157.48,147.64 r180 bottom
Rvs0 "Res3" J1-0603 364.17,3267.72 r0 bottom
Rvs1 "Res3" J1-0603 368.11,2883.86 r0 bottom
Rvs2 "Res3" J1-0603 374.02,2440.95 r0 bottom
Rvs3 "Res3" J1-0603 472.44,2263.78 r180 bottom
Rvs4 "Res3" J1-0603 472.44,1496.06 r0 bottom
Rvs5 "Res3" J1-0603 462.6,1309.06 r180 bottom
Rvs6 "Res3" J1-0603 777.56,561.02 r0 bottom
Rvs7 "Res3" J1-0603 915.35,403.54 r180 bottom

## Footprints (in the part's own frame and the unit in brackets; to place one, negate y for a bottom-side part, rotate by r counter-clockwise, add the part's x,y. Pads: shape width x height; smd on the part's side, far side on the other; paste and mask are expansions set on the pad)
3POSHEADER [mm] "3 position header smt"
  rect 1x2 smd: 1(-2.515,1.61) 2(-0.005,-1.61) 3(2.495,1.61)
  silkscreen extent -3.94,-1.3 3.91,1.3
319_4 [mil]
  rect 70x240 smd: 1(-150,0) 2(-50,0) 3(50,0) 4(150,0)
0402 [mm] "Chip Capacitor, Body 1.0x0.5mm, IPC High Density"
  rect 0.6x0.5 smd: 1(-0.5,0) 2(0.5,0)
  body extent -0.55,-0.3 0.55,0.3, height 1.3
810_4 [mil]
  rect 70x240 smd: 1(-150,0) 2(-50,0) 3(50,0) 4(150,0)
J1-0603 [mm] "Chip Resistor, Body 1.6x0.8mm, IPC High Density"
  rect 0.7x0.9 smd: 1(-0.75,0) 2(0.75,0)
  silkscreen extent -0.2,-0.35 0.2,0.35, body extent -0.85,-0.48 0.85,0.48, height 0.9
NPTC202KFMS-RC [mil] "40 Position Header Connector 0.100\" (2.54mm) Surface Mount Tin"
  rect 41x63 smd: 1(-950,115) 2(-850,115) 3(-750,115) 4(-650,115) 5(-550,115) 6(-450,115) 7(-350,115) 8(-250,115) 9(-150,115) 10(-50,115) 11(50,115) 12(150,115) 13(250,115) 14(350,115) 15(450,115) 16(550,115) 17(650,115) 18(750,115) 19(850,115) 20(950,115) 21(-950,-115) 22(-850,-115) 23(-750,-115) 24(-650,-115) 25(-550,-115) 26(-450,-115) 27(-350,-115) 28(-250,-115) 29(-150,-115) 30(-50,-115) 31(50,-115) 32(150,-115) 33(250,-115) 34(350,-115) 35(450,-115) 36(550,-115) 37(650,-115) 38(750,-115) 39(850,-115) 40(950,-115)
  silkscreen extent -1030,-105 1030,105
"SFH 4056" [mm] "Infrared (IR) Emitter 860nm 1.6V 70mA 35mW/sr @ 70mA 44° 2-SMD, No Lead"
  rect 1x1.6 smd: 1(1.4,0) 2(-1.4,0)
  silkscreen extent -0.2,-0.35 0.5,0.35
SON75P200X200X100-6N [mil]
  rect 37.4x15.75 smd: CKI(-35.43,0) CKO(35.43,0) GND(-35.43,-29.53) SDI(-35.43,29.53) SDO(35.43,29.53) VCC(35.43,-29.53)
  silkscreen extent -59,-31 0,65
SOP65P640X110-16N [mil]
  rect 58x14 smd: 1(-115,90) 2(-115,64) 3(-115,38) 4(-115,13) 5(-115,-13) 6(-115,-38) 7(-115,-64) 8(-115,-90) 9(115,-90) 10(115,-64) 11(115,-38) 12(115,-13) 13(115,13) 14(115,38) 15(115,64) 16(115,90)
  silkscreen extent -65,-100 198,100
SOT65P220X100-3N [mm]
  rect 1.15x0.55 smd: 1(-1,0.65) 2(-1,-0.65) 3(1,0)
  silkscreen extent -1.58,-1 0.07,1.18
SOT95P285X130-3N [mil]
  rect 45.28x23.62 smd: 1(-51.18,37.4) 2(-51.18,-37.4) 3(51.18,0)
  silkscreen extent -74,-59 15,59
VEMT2020X01 [mm] "Phototransistor 860nm Top View 2-SMD, Gull Wing"
  rect 1.35x0.75 smd: 1(-1.9,0) 2(1.9,0)
  silkscreen extent -1.3,-1.3 1.3,1.3

## Part data
319_0 319_1 319_2 319_3: "pad for mill max 319 series"
810_0 810_1 810_2 810_3: "pad for mill max 810 series"
C1 C2 C3 C4: "Capacitor (Semiconductor SIM Model)"
H1 H2: "40 Position Header Connector 0.100\" (2.54mm) Surface Mount Tin"
H_3_1: "3 POS HEADER"
IR1 IR2 IR3 IR4 IR5 IR6 IR7 IR8 IR9 IR10 IR11 IR12 IR13 IR14 IR15 IR16 IR17 IR18 IR19 IR20 IR21 IR22 IR23 IR24 IR25 IR26 IR27 IR28 IR29 IR30 IR31 IR32 IR33 IR34 IR35 IR36 IR37 IR38 IR39 IR40 IR41 IR42 IR43 IR44 IR45 IR46 IR47 IR48 IR49 IR50 IR51 IR52 IR53 IR54 IR55 IR56 IR57 IR58 IR59 IR60 IR61 IR62 IR63 IR64: "IR26-51C SMD IR Emitter"
IR_R1 IR_R2 IR_R3 IR_R4 IR_R5 IR_R6 IR_R7 IR_R8 IR_R9 IR_R10 IR_R11 IR_R12 IR_R13 IR_R14 IR_R15 IR_R16 IR_R17 IR_R18 IR_R19 IR_R20 IR_R21 IR_R22 IR_R23 IR_R24 IR_R25 IR_R26 IR_R27 IR_R28 IR_R29 IR_R30 IR_R31 IR_R32 IR_R33 IR_R34 IR_R35 IR_R36 IR_R37 IR_R38 IR_R39 IR_R40 IR_R41 IR_R42 IR_R43 IR_R44 IR_R45 IR_R46 IR_R47 IR_R48 IR_R49 IR_R50 IR_R51 IR_R52 IR_R53 IR_R54 IR_R55 IR_R56 IR_R57 IR_R58 IR_R59 IR_R60 IR_R61 IR_R62 IR_R63 IR_R64: "IR Emitter Resistor"
LED1 LED2 LED3 LED4 LED5 LED6 LED7 LED8 LED9 LED10 LED11 LED12 LED13 LED14 LED15 LED16 LED17 LED18 LED19 LED20 LED21 LED22 LED23 LED24 LED25 LED26 LED27 LED28 LED29 LED30 LED31 LED32 LED33 LED34 LED35 LED36 LED37 LED38 LED39 LED40 LED41 LED42 LED43 LED44 LED45 LED46 LED47 LED48 LED49 LED50 LED51 LED52 LED53 LED54 LED55 LED56 LED57 LED58 LED59 LED60 LED61 LED62 LED63 LED64: library part COM-14608
M_C M_R: library part 74HC4051PW,118
MOSN0 MOSN1 MOSN2 MOSN3 MOSN4 MOSN5 MOSN6 MOSN7: library part DMN1019USN-7
MOSP0 MOSP1 MOSP2 MOSP3 MOSP4 MOSP5 MOSP6 MOSP7: library part NTS2101PT1G
PT_R1 PT_R2 PT_R3 PT_R4 PT_R5 PT_R6 PT_R7 PT_R8 PT_R9 PT_R10 PT_R11 PT_R12 PT_R13 PT_R14 PT_R15 PT_R16 PT_R17 PT_R18 PT_R19 PT_R20 PT_R21 PT_R22 PT_R23 PT_R24 PT_R25 PT_R26 PT_R27 PT_R28 PT_R29 PT_R30 PT_R31 PT_R32 PT_R33 PT_R34 PT_R35 PT_R36 PT_R37 PT_R38 PT_R39 PT_R40 PT_R41 PT_R42 PT_R43 PT_R44 PT_R45 PT_R46 PT_R47 PT_R48 PT_R49 PT_R50 PT_R51 PT_R52 PT_R53 PT_R54 PT_R55 PT_R56 PT_R57 PT_R58 PT_R59 PT_R60 PT_R61 PT_R62 PT_R63 PT_R64: "Phototransitor Resistor"
R200 ROUT0 ROUT1: "Resistor"
R201: library part Res3, "Resistor"
Rcg0 Rcg1 Rcg2 Rcg3 Rcg4 Rcg5 Rcg6 Rcg7: "Rcg Resistor"
Rci0 Rci1 Rci2 Rci3 Rci4 Rci5 Rci6 Rci7: "Csel Resistor"
Rin0 Rin1 Rin2 Rin3 Rin4 Rin5 Rin6 Rin7: "Rsel resistor"
Rvs0 Rvs1 Rvs2 Rvs3 Rvs4 Rvs5 Rvs6 Rvs7: "Rvs Resistor"

## Via types
v1: diameter 50, hole 28, Top Layer to Bottom Layer, 321 vias

## Nets (pads, with @x,y where several pads share a name; then routed paths per layer and width w, separated by ;. In a path a pad name is that pad's centre, name@x,y a point inside that pad or via, vN(x,y) a via of type N, cw(c..) or ccw(c..) an arc to the next point about the centre after c; other vN are vias at no path point)
18V: 319_0.3 319_1.2 319_2.3 319_3.2 810_0.3 810_1.2 810_2.3 810_3.2 C1.2 C2.2 C3.2 C4.2 H_3_1.3 | length 2565.1
  Bottom Layer w10: 810_1.2@147.64,1564.17 223.85,1564.17 275.59,1512.44 275.59,1424.59 v1@239.5,1388.5 ; 810_0.3@147.64,2097.24 227.17,2097.24 289,2159.08 289,2231.97 220.97,2300 206,2285.03 v1(206,2299) v1@206,2283.88 ; C3.2@167.69,1393 184.69,1376 v1(240,1376) ; v1@207,2282.88 v1@206,2283.88 ; v1@222.12,2300 v1@206,2283.88 ; C4.2@1378,3409.31 C4.2@1379,3408.31 1379,3392 1439,3332 v1(1439,3316) 1439,3325.61 1445.61,3319 1564.17,3437.57 810_2.3@1564.17,3513.78 ; C1.2@1408.69,310 1411.6,307.09 v1(1480.31,307.09) 1480.94,307.09 1564.17,223.85 319_0.3@1564.17,147.64 ; H_3_1.3@1897.23,2661.61 1905,2669.39 1905,2720 1927,2742 v1(1927,2756) ; 319_1.2@2066.93,177.95 2097.24,147.64 2097.24,223.85 2188.35,314.96 v1(2204.72,314.96) ; 810_3.2@2097.24,3513.78 810_3.2@2097.24,3437.57 ; 810_3.2@2098,3436.81 810_3.2@2097.24,3437.57 ; v1(2216,3354) 2180.81,3354 810_3.2@2097.24,3437.57 ; v1(3358,1444) 3358,1450.83 3348,1460.83 3451.35,1564.17 319_3.2@3513.78,1564.17 ; C2.2@3375.31,2269 3346.46,2240.14 v1(3346.46,2194.88) 3339.93,2194.88 3437.57,2097.24 319_2.3@3513.78,2097.24
ADC_COL0: H2.25 PT1.2 PT9.2 PT17.2 PT25.2 PT33.2 PT41.2 PT49.2 PT57.2 PT_R1.2 PT_R9.2 PT_R17.2 PT_R25.2 PT_R33.2 PT_R41.2 PT_R49.2 PT_R57.2 | length 9131.1
  Top Layer w10: v1(233,2446) 233,2447.57 250.98,2465.55 PT17.2@314.96,2465.55 ; v1@236.22,98.42 v1(236.22,78.74) 311.02,78.74 PT57.2@314.96,82.68 ; v1(236.22,2834.65) 236.22,2838.58 PT9.2@314.96,2917.32 ; v1@237.2,993.11 236.22,992.13 234,989.91 v1(234,989) 276.4,989 PT41.2@314.96,1027.56 ; PT49.2@314.96,574.8 269.69,574.8 v1(236.22,541.34) 406.03,541.34 514.93,432.44 1625.87,432.44 1642.43,449 1797.58,449 1869.58,377 1939.57,377 2002.57,440 2038.57,440 2055.97,422.6 2907.72,422.6 v1@2917.56,432.44 ; PT33.2@314.96,1519.69 374.02,1519.69 398.33,1544 v1(389,1544) ; PT25.2@314.96,1972.44 387.8,1972.44 406,1990.65 v1(406,2001) ; PT1.2@322.56,3562.99 v1@383.86,3562.99
  Bottom Layer w10: v1(236.22,78.74) PT_R57.2@236.22,295.28 v1(236.22,541.34) PT_R49.2@236.22,767.72 236.22,1286.79 336.28,1386.85 349.66,1386.85 389,1426.19 v1(389,1544) 398.45,1544 406,1551.55 v1(406,2001) 406,2052.19 375,2083.19 375,2219.69 236.22,2358.47 PT_R25.2@236.22,2381.89 226.38,2391.73 233,2398.36 v1(233,2446) 233,2641.01 226.38,2647.64 PT_R17.2@236.22,2657.48 v1(236.22,2834.65) PT_R1.2@236.22,3346.46 236.22,3415.35 v1@383.86,3562.99 ; H2.25@2850,2135 2850,2035 2928,1957 v1(2933,1957) 2933,1725.21 2935,1723.21 2914.5,1702.71 2914.5,1388.5 2935,1368 2935,611.8 2946.1,600.7 2946.1,560.72 2935.82,550.43 2889.46,550.43 2880.67,541.65 2880.67,454.33 v1(2915,420)
  other v1: 383.86,3561
ADC_COL1: H2.26 PT2.2 PT10.2 PT18.2 PT26.2 PT34.2 PT42.2 PT50.2 PT58.2 PT_R2.2 PT_R10.2 PT_R18.2 PT_R26.2 PT_R34.2 PT_R42.2 PT_R50.2 PT_R58.2 | length 7401.5
  Top Layer w10: v1(452.76,1938.98) 478.35,1938.98 PT26.2@511.81,1972.44 ; PT18.2@501.97,2464.57 537.4,2464.57 v1(590.55,2411.42) 631.97,2370 717.28,2370 729.28,2358 1969.29,2358 2022.29,2305 2285.15,2305 2364.15,2226 2417,2226 2505,2314 2567,2314 2707,2454 v1(2750,2454) ; PT10.2@501.97,2917.32 504.65,2920 511.73,2912.91 511.73,2909.72 523.45,2898 526.65,2898 590.01,2834.64 v1(600.39,2834.64) ; PT58.2@511.81,82.68 596.46,82.68 v1@610.24,68.9 ; PT50.2@511.81,574.8 586.61,574.8 591,570.42 v1(591,563) ; PT42.2@511.81,1027.56 517.72,1033.46 v1(610.24,1033.46) ; PT34.2@511.81,1519.69 555.12,1519.69 589,1485.8 v1(589,1478) ; PT2.2@511.81,3559.06 519.35,3566.6 604,3566.6 v1(604,3570) ; v1@590.55,1879.92 561.02,1850.39 541.34,1850.39 ; 541.34,1850.39 433.07,1850.39 v1(452.76,1850.39) 541.34,1850.39
  Bottom Layer w10: v1(452.76,1850.39) v1(452.76,1938.98) ; v1(589,1478) 589,1477.93 v1@590.55,1476.38 ; v1(590.55,1879.92) PT_R34.2@590.55,1801.18 v1@590.55,1476.38 ; v1@590.55,1889.76 590.55,1958.66 PT_R18.2@590.55,2657.48 590.01,2658.03 600.39,2668.41 v1(600.39,2834.64) 600.39,3118.99 590.01,3129.37 604,3143.37 v1(604,3570) ; v1@610.24,68.9 610.24,275.59 PT_R58.2@590.55,295.28 PT_R50.2@590.55,767.72 609.33,786.5 609.33,880.28 602.12,887.49 602.12,923.54 610.24,931.65 v1(610.24,1033.46) 600.39,1033.46 590.55,1043.31 PT_R42.2@590.55,1240.16 v1@590.55,1476.38 ; H2.26@2750,2135 2785.5,2170.5 2785.5,2417.5 2750,2453 v1(2750,2454)
  other v1: 610.24,78.74
ADC_COL2: H2.27 PT3.2 PT11.2 PT19.2 PT27.2 PT35.2 PT43.2 PT51.2 PT59.2 PT_R3.2 PT_R11.2 PT_R19.2 PT_R27.2 PT_R35.2 PT_R43.2 PT_R51.2 PT_R59.2 | length 7081.8
  Top Layer w10: PT19.2@974.41,2464.57 1027.56,2411.42 v1(1092.52,2411.42) 1125.94,2378 1977.57,2378 2030.57,2325 2293.43,2325 2372.43,2246 2408.72,2246 2496.72,2334 2530,2334 v1(2650,2454) ; PT11.2@974.41,2917.32 1027.56,2917.32 1092.52,2852.36 v1(1092.52,2834.65) ; PT59.2@984.25,82.68 990.16,88.58 v1(1092.52,88.58) ; PT51.2@984.25,574.8 1029.53,574.8 v1(1092.52,511.81) ; PT43.2@984.25,1027.56 990.16,1033.46 v1(1092.52,1033.46) ; PT35.2@984.25,1519.69 1049.21,1519.69 1078,1490.9 v1(1078,1487) ; PT27.2@984.25,1972.44 1090.08,1972.44 v1(1092.52,1970) ; PT3.2@984.25,3562.99 992.26,3571 v1(1082,3571)
  Bottom Layer w10: v1@1082,3563.67 1092.52,3553.15 1092.52,2824.8 v1(1092.52,2834.65) PT_R19.2@1092.52,2657.48 ; PT_R19.2@1082.68,2667.32 PT_R19.2@1092.52,2657.48 ; v1@1087,2405.9 v1(1092.52,2411.42) ; v1(1092.52,88.58) PT_R59.2@1092.52,295.28 v1(1092.52,511.81) PT_R51.2@1092.52,767.72 v1(1092.52,1970) v1(1092.52,2411.42) ; v1(1092.52,1033.46) 1093,1032.98 v1@1093,511.81 ; H2.27@2650,2135 2614.5,2170.5 2614.5,2418.5 v1(2650,2454) ; v1(1092.52,2411.42) PT_R19.2@1092.52,2657.48
ADC_COL3: H2.28 PT4.2 PT12.2 PT20.2 PT28.2 PT36.2 PT44.2 PT52.2 PT60.2 PT_R4.2 PT_R12.2 PT_R20.2 PT_R28.2 PT_R36.2 PT_R44.2 PT_R52.2 PT_R60.2 | length 6803
  Top Layer w10: v1(1254,3540) 1342.38,3540 1361.38,3521 1394.52,3521 1407.3,3533.78 1431.42,3533.78 PT4.2@1456.69,3559.06 ; v1@1328.74,98.43 1440.94,98.43 PT60.2@1456.69,82.68 ; v1(1374,612) 1419.5,612 PT52.2@1456.69,574.8 ; v1@1377,2494.72 v1(1377,2503) 1408.42,2503 PT20.2@1446.85,2464.57 ; v1(1387.8,1043.31) 1403.54,1027.56 PT44.2@1456.69,1027.56 ; v1(1389,1545) 1430.83,1545 1431.1,1545.28 PT36.2@1456.69,1519.69 ; v1@1427.17,1868 v1(1427.17,1890) 1427.17,1942.58 1427,1942.75 PT28.2@1456.69,1972.44 ; PT12.2@1446.85,2917.32 1425,2895.47 v1(1425,2815) 1428,2818 1593,2818 1615,2796 2323.15,2796 2333.15,2786 2382.85,2786 2392.85,2796 2459.43,2796 2478.43,2815 2570,2815 v1(2575,2810)
  Bottom Layer w10: v1(1254,3540) 1254,3413.57 1305,3362.57 1305,3322.04 1254,3271.04 PT_R4.2@1262.17,3262.87 1262.17,3259.38 1291.38,3230.16 1320.58,3230.16 PT_R12.2@1427.17,3123.58 ; v1@1328.74,98.43 1328.74,423.23 1353.11,447.6 1410,447.6 1427.16,430.44 PT_R60.2@1427.17,403.54 1427.17,551.83 1374,605 v1(1374,612) 1383,612 1427.16,656.16 PT_R52.2@1427.17,767.72 1427.17,1003.94 v1(1387.8,1043.31) 1427.17,1082.68 PT_R44.2@1427.17,1240.16 1427.17,1376.83 1406,1398 v1@1406,1536.5 ; v1(1377,2503) 1427.17,2553.17 PT_R20.2@1427.17,2657.48 ; v1@1386,2483 1384,2481 1384,2432.5 1405.5,2411 1405.5,2236.29 1460.29,2181.5 1476.71,2181.5 1485.5,2172.71 1485.5,1997.29 1460.85,1972.64 1427.17,1972.64 v1(1427.17,1890) ; v1(1389,1545) 1408,1545 1408,1705 1427.17,1724.17 v1@1427.17,1868 ; PT_R20.2@1424.78,2655.09 PT_R20.2@1427.17,2657.48 ; PT_R12.2@1427.17,3129.92 PT_R12.2@1427.17,3123.58 ; H2.28@2550,2135 2550,2191.79 2514.5,2227.29 2514.5,2703.99 2575,2764.49 v1(2575,2810) ; v1@1427.17,1868 v1(1427.17,1890) ; v1@1427.17,1868 v1(1427.17,1890) ; PT_R20.2@1427.17,2657.48 1425,2659.65 v1(1425,2815) 1425,3121.41 PT_R12.2@1427.17,3123.58
  other v1: 1328.74,88.58
ADC_COL4: H2.29 PT5.2 PT13.2 PT21.2 PT29.2 PT37.2 PT45.2 PT53.2 PT61.2 PT_R5.2 PT_R13.2 PT_R21.2 PT_R29.2 PT_R37.2 PT_R45.2 PT_R53.2 PT_R61.2 | length 9939.8
  Top Layer w10: PT21.2@1919.29,2464.57 2038.86,2345 2330,2345 v1(2389,2286) ; PT13.2@1919.29,2917.32 1930.97,2929 2259.43,2929 2308.43,2880 2335,2880 2358,2857 v1(2358,2846) ; PT61.2@1929.13,82.68 2081.95,82.68 2123.53,41.1 2459.1,41.1 v1(2492,74) ; PT53.2@1929.13,574.8 1981.94,522 2087,522 v1(2120,555) ; PT45.2@1929.13,1027.56 1958.69,998 2166.57,998 2191.57,1023 v1@2330.98,1023 ; PT37.2@1929.13,1519.69 1929.13,1515.75 1935.39,1522 2013.95,1522 2070.95,1465 2133.77,1465 2197.77,1529 v1(2208,1532) ; PT5.2@1929.13,3559.06 1935.04,3553.15 2061.72,3553.15 2136.57,3628 2523.57,3628 2580.57,3571 v1(2588,3571) ; PT29.2@1931,1972.44 1931,1944 1980,1895 v1(1980,1887) 1987.28,1887 1995.28,1895 2049.28,1841 2367.42,1841 v1@2370.42,1844 ; v1@2339.98,1036 v1(2339,1036) v1@2339,1031.02 ; v1@2341.98,1034 v1@2339,1031.02 ; v1(2473,1014) 2456,997 2433.57,997 2422.55,985.98 2380.6,985.98 2339,1027.58 v1@2339,1031.02
  Bottom Layer w10: PT_R29.2@1975.47,1970 1980,1965.47 v1(1980,1887) 1985.21,1887 2034.21,1838 2056,1838 2208,1686 v1(2208,1532) ; v1(2120,555) 2165,510 2179.57,510 2205.35,484.21 2205.35,439.65 2280.83,364.17 2323.17,364.17 2362.2,403.2 PT_R53.2@2362.2,767.72 2362.2,1003.94 2330.14,1036 v1(2339,1036) 2339,1047 2363,1071 PT_R45.2@2363,1240.16 ; v1(2358,2846) 2365,2853 2365,2936.57 2358,2943.57 2358,3248.08 2365,3255.08 2362.2,3257.87 2362.2,3360 2573.2,3571 v1(2588,3571) ; PT_R61.2@2362.2,403.54 2362.2,108.27 2396.47,74 v1(2492,74) ; PT_R45.2@2362.2,1240.16 2362.2,1373.99 2385.5,1397.29 2385.5,1707.89 PT_R37.2@2362.2,1731.18 2362.2,1734.02 2385,1756.82 v1@2385,1830.5 ; v1@2368.28,2846.72 2355,2833.43 2355,2715.15 2362.2,2707.94 PT_R21.2@2362.2,2657.48 2385,2634.68 2385,2403.21 2385.5,2402.71 2385.5,2327.29 2385,2326.79 2385,2173.21 2385.5,2172.71 2385.5,2097.29 2385,2096.79 v1@2385,1830.5 ; v1(2385,1840) v1@2385,1830.5 ; H2.29@2450,2135 2450,1926 2531.46,1844.54 2531.46,1729.61 2485.5,1683.66 2485.5,1397.29 2455.75,1367.53 2455.75,1231.07 2473,1213.82 v1(2473,1014)
ADC_COL5: H2.30 PT6.2 PT14.2 PT22.2 PT30.2 PT38.2 PT46.2 PT54.2 PT62.2 PT_R6.2 PT_R14.2 PT_R22.2 PT_R30.2 PT_R38.2 PT_R46.2 PT_R54.2 PT_R62.2 | length 7922.5
  Top Layer w10: v1(2276,3541) 2282,3547 2389.52,3547 PT6.2@2401.57,3559.06 ; v1@2310.87,2464.57 PT22.2@2391.73,2464.57 ; v1(2325,2920) 2389.06,2920 PT14.2@2391.73,2917.32 2437.47,2871.58 2674.73,2871.58 v1@2726.38,2923.23 ; PT62.2@2396.65,73.82 2396.65,76.28 2425.38,105 2466.43,105 2475.43,114 2508.57,114 2518.32,104.25 2661.75,104.25 v1@2681,85 ; PT54.2@2401,576 2452,525 2452,465.32 v1@2454.72,462.6 ; PT46.2@2401.57,1027.56 2417.32,1043.31 2439.31,1043.31 2453,1057 2495,1057 2508.69,1043.31 v1(2726.38,1043.31) ; PT38.2@2401.57,1519.69 2454.26,1467 2679,1467 v1(2722,1510) ; PT30.2@2401.57,1972.44 2407.13,1978 2335.07,1978 2335.07,1976.64 2291,1932.57 2291,1884.43 2314.43,1861 2347.57,1861 2373.57,1887 2650.43,1887 2680.43,1917 2715.57,1917 2754.57,1878 v1(2767,1878)
  Bottom Layer w10: v1@2270.85,3546.15 v1(2276,3541) 2276,3432.85 2323.43,3385.43 2323.43,3105.99 2325,3104.42 v1(2325,2920) 2325,2869.57 2318,2862.57 2318,2829.43 2325,2822.43 2325,2688.34 2331.93,2681.41 2331.93,2561.93 2300,2530 v1(2300,2460) 2300,2309 2325,2284 2325,2242.15 2350,2217.15 H2.30@2350,2135 ; v1(2450.79,462.6) 2473.97,462.6 2587,349.57 2587,166 2668,85 2695,85 2726.38,116.38 PT_R54.2@2726.38,767.72 v1(2726.38,1043.31) 2665.43,1104.25 PT_R46.2@2665.43,1109 ; PT_R46.2@2662.47,1109 2662.47,1144.9 2695,1177.43 2695,1314.43 2681,1328.43 2681,1361.57 2695,1375.57 2695,1483 v1(2722,1510) 2785.5,1573.5 2785.5,1929.03 PT_R30.2@2769.53,1945 2769.53,2042.26 2710,2101.79 2710,2210.43 2711,2211.43 2711,2244.57 2710,2245.57 2710,2600.62 2726.38,2617 PT_R22.2@2726.38,2657.48 v1(2726.38,2913.39) PT_R14.2@2726.38,3208.66 PT_R6.2@2726.38,3346.46 ; PT_R30.2@2772.03,1947.5 PT_R30.2@2779.53,1940
  other v1: 2681,74
ADC_COL6: H2.31 PT7.2 PT15.2 PT23.2 PT31.2 PT39.2 PT47.2 PT55.2 PT63.2 PT_R7.2 PT_R15.2 PT_R23.2 PT_R31.2 PT_R39.2 PT_R47.2 PT_R55.2 PT_R63.2 | length 7142.5
  Top Layer w10: v1(2101,2451) 2176,2451 2241,2386 2523,2386 2639,2502 2807.06,2502 PT23.2@2844.49,2464.57 ; v1(2840,494) 2858,512 PT55.2@2858,596.43 ; PT23.2@2843.86,2463.94 2849.24,2463.94 2907.18,2406 3029.07,2406 3071.07,2448 v1(3076,2448) ; PT15.2@2844.49,2917.32 2844.49,2903.54 2883.86,2864.17 3041.34,2864.17 3080.71,2903.54 v1(3080.71,2913.39) ; PT63.2@2854.33,82.68 2923.32,82.68 2964,42 3057,42 3101,86 v1(3101,82) v1@3101,69.5 ; PT47.2@2854.33,1027.56 2854,1027.56 2926.56,955 v1(3080,955) ; PT39.2@2854.33,1519.69 2877.31,1519.69 2930,1467 3023,1467 v1(3074,1518) ; PT31.2@2854.33,1972.44 2860.94,1979.06 2860.94,1972.49 2940.43,1893 v1(3082,1893) ; PT7.2@2854.33,3553.15 2866.18,3565 v1(3080,3565)
  Bottom Layer w10: v1(2101,2451) 2137.21,2451 2214.5,2373.71 2214.5,2307 2250,2271.5 H2.31@2250,2135 ; v1(2840,494) 2840,438.43 2898.43,380 2934.68,380 2970.19,344.49 3031.5,344.49 PT_R63.2@3080.71,295.28 ; v1@3080.71,3562.99 v1(3080.71,2913.39) PT_R23.2@3080.71,2657.48 3085.5,2657.48 3085.5,1963.45 PT_R31.2@3080.71,1958.66 3082,1957.37 v1(3082,1893) 3082,1802.47 PT_R39.2@3080.71,1801.18 3079.21,1799.69 3079.21,1709 3085.5,1702.71 3085.5,1543.71 3014.5,1472.71 3014.5,1397.29 3085.5,1326.29 3085.5,1240.16 PT_R47.2@3080.71,1240.16 PT_R55.2@3080.71,767.72 PT_R63.2@3080.71,295.28 ; v1@3101,86 3101,274.98 PT_R63.2@3080.71,295.28 ; PT_R63.2@3080.71,295.28 PT_R63.2@3080.53,295.28 PT_R63.2@3080.71,295.28
ADC_COL7: H2.32 PT8.2 PT16.2 PT24.2 PT32.2 PT40.2 PT48.2 PT56.2 PT64.2 PT_R8.2 PT_R16.2 PT_R24.2 PT_R32.2 PT_R40.2 PT_R48.2 PT_R56.2 PT_R64.2 | length 7273.6
  Top Layer w10: v1(2036,2889) 2258.43,2889 2341.43,2806 2374.57,2806 2412.74,2844.17 2552.6,2844.17 2558.43,2850 2591.57,2850 2597.4,2844.17 3161.1,2844.17 v1(3257.87,2940.94) 3312.99,2940.94 PT16.2@3336.61,2917.32 ; v1(3195,1890) 3273.5,1968.5 PT32.2@3336.61,1968.5 ; v1@3230,1505 3331.77,1505 PT40.2@3346.46,1519.69 ; v1@3323,2321 3322,2320 v1(3322,2316) 3322,2319 v1@3336.05,2333.05 ; v1@3336.61,2333.61 PT24.2@3336.61,2464.57 ; PT64.2@3346.46,82.68 3420.32,82.68 v1(3421,82) ; PT48.2@3346.46,1027.56 3395,979.02 v1(3395,910) ; PT8.2@3346.46,3562.99 3435.04,3562.99 v1(3435.04,3582.68) ; PT56.2@3350,573 3364.01,573 v1@3415.35,521.65
  Bottom Layer w10: v1(2036,2889) 2036,2886 2014.5,2864.5 2014.5,2278.5 H2.32@2154,2139 ; v1@3214.5,1500.5 3214.5,1355.5 3230,1340 3313,1340 3390,1263 3390,547.01 3424,513.01 v1(3424,521) 3424,510.62 3415.35,501.97 PT_R64.2@3415.35,295.28 3415.35,87.65 v1(3421,82) ; 3215,1480 3215,1626.79 3214.5,1627.29 3214.5,1702.71 3215,1703.21 3215,1717 3228,1730 3228,1849 3195,1882 v1(3195,1890) 3287,1982 3287,2131.57 3286.46,2132.11 3286.46,2279.58 3322.88,2316 v1(3322,2316) 3350.72,2316 3415.35,2380.64 PT_R32.2@3415.35,2381.89 3415.35,2910 3384.41,2940.94 ; v1(3257.87,2940.94) 3384.41,2940.94 ; PT_R16.2@3415.35,3129.92 PT_R8.2@3415.36,3350 ; v1(3435.04,3582.68) 3435.04,3562.99 3415.35,3543.31 PT_R8.2@3415.35,3346.46 3415.35,2971.89 3384.41,2940.94
  other v1: 3210,1515
CKI: H2.35 LED1.CKI | length 3464.9
  Top Layer w10: LED1.CKI@141.74,3484.25 123.48,3484.25 108.04,3499.69 108.04,3533.04 205,3630 851.57,3630 906.57,3575 v1(925,3575) ; v1(925,3235) 1380.43,3235 1420.43,3195 1484.09,3195 1516.8,3227.72 1644.15,3227.72 1688.43,3272 1721.57,3272 1748.57,3245 v1(1775,3245)
  Bottom Layer w10: v1(925,3235) v1(925,3575) ; v1(1775,3245) 1775,3243.43 1630,3098.43 1630,2458.21 1685.5,2402.71 1685.5,2356.29 1723.29,2318.5 1724.5,2318.5 1850,2193 H2.35@1850,2135
COL0: IR_R1.1 IR_R9.1 IR_R17.1 IR_R25.1 IR_R33.1 IR_R41.1 IR_R49.1 IR_R57.1 MOSN0.3 | length 3242.2
  Bottom Layer w10: IR_R57.1@187.01,295.28 187.01,472.44 187.01,1265.86 328,1406.85 341.37,1406.85 364.8,1430.28 364.8,1511.63 349,1527.43 349,1560.57 385,1596.57 385,1959 355,1989 355,2211.41 217.23,2349.17 216.23,2349.17 207.44,2357.96 207.44,2358.97 187.01,2379.4 IR_R25.1@187.01,2381.89 186.38,2382.52 186.38,2656.85 IR_R17.1@187.01,2657.48 187.01,3221.44 193,3227.43 193,3340.47 IR_R1.1@187.01,3346.46
COL1: IR_R2.1 IR_R10.1 IR_R18.1 IR_R26.1 IR_R34.1 IR_R42.1 IR_R50.1 IR_R58.1 MOSN1.3 | length 3068.9
  Bottom Layer w10: IR_R58.1@639.76,295.28 639.76,1006.42 650.24,1016.9 650.24,1050.03 639.76,1060.51 IR_R42.1@639.76,1240.16 638.82,1241.1 638.82,1800.24 640.39,1801.81 640.39,2411.75 631,2421.15 631,2470.85 640.39,2480.25 640.39,2851.21 639.76,2851.84 IR_R2.1@639.76,3346.46
COL2: IR_R3.1 IR_R11.1 IR_R19.1 IR_R27.1 IR_R35.1 IR_R43.1 IR_R51.1 IR_R59.1 MOSN2.3 | length 3054.8
  Bottom Layer w10: IR_R59.1@1141.73,295.28 IR_R51.1@1141.73,767.72 1137.33,772.12 1137.33,1954.26 1141.73,1958.66 IR_R11.1@1141.73,3129.92 IR_R3.1@1141.73,3346.46
COL3: IR_R4.1 IR_R12.1 IR_R20.1 IR_R28.1 IR_R36.1 IR_R44.1 IR_R52.1 IR_R60.1 MOSN3.3 | length 3019.2
  Bottom Layer w10: IR_R4.1@1311.38,3262.87 1311.38,3269.22 1350.44,3230.16 1379.64,3230.16 1476.38,3133.42 IR_R12.1@1476.38,3129.92 IR_R20.1@1476.38,2657.48 1494.5,2639.36 1494.5,2219 1508,2205.5 1508,1939.57 1543,1904.57 1543,1871.43 1500.47,1828.9 IR_R36.1@1500.47,1750 1500.47,1333.15 1476.38,1309.05 IR_R52.1@1476.38,767.72 1476.38,519.69 MOSN3.3@1468.5,511.81 1468.5,411.42 IR_R60.1@1476.38,403.54